# Altium PCB Circular PCB - Radial.PcbDoc (part 1 of 4)
Units mm, origin at the board's own origin, x right, y up, seen from the top; angles counter-clockwise.
Board outline 100 x 100 mm, 6 copper layers (Top Layer, GND (Top), X, Y, GND (Bot), Bottom Layer), stack 1.599 mm thick; 194 components, 127 nets, 612 pads, 161 vias.
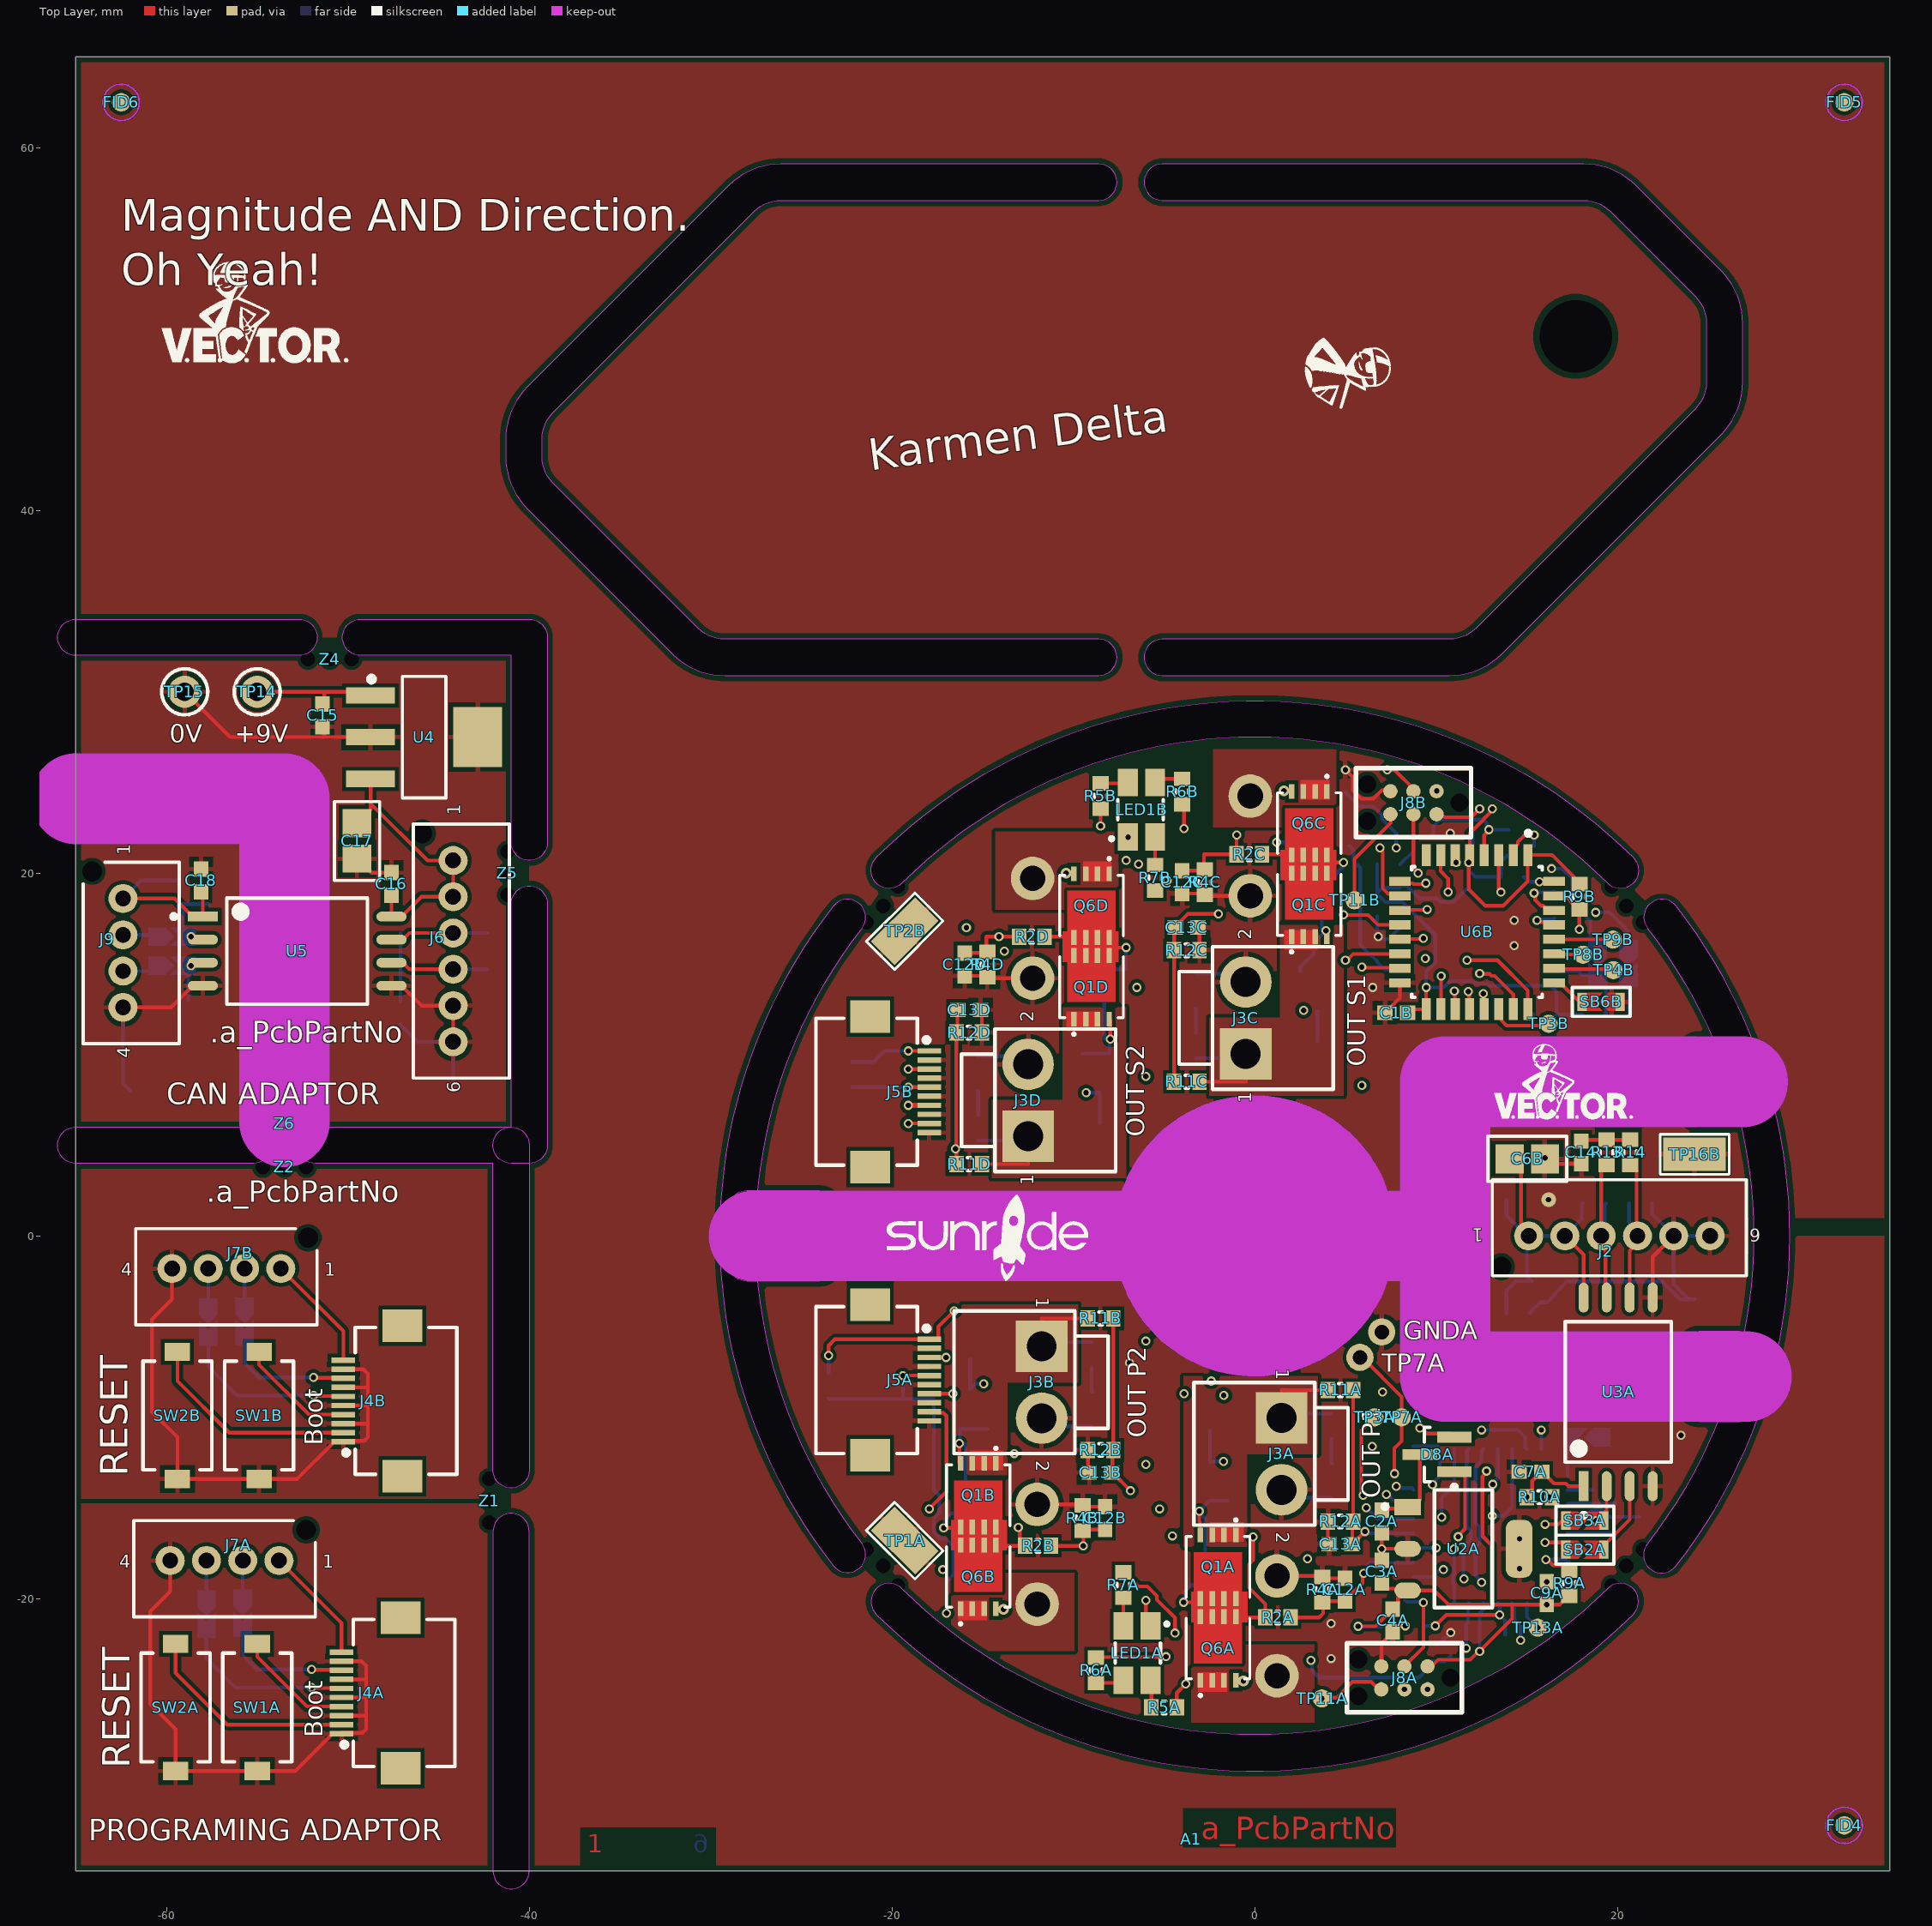
[diagram p0: Top Layer view]
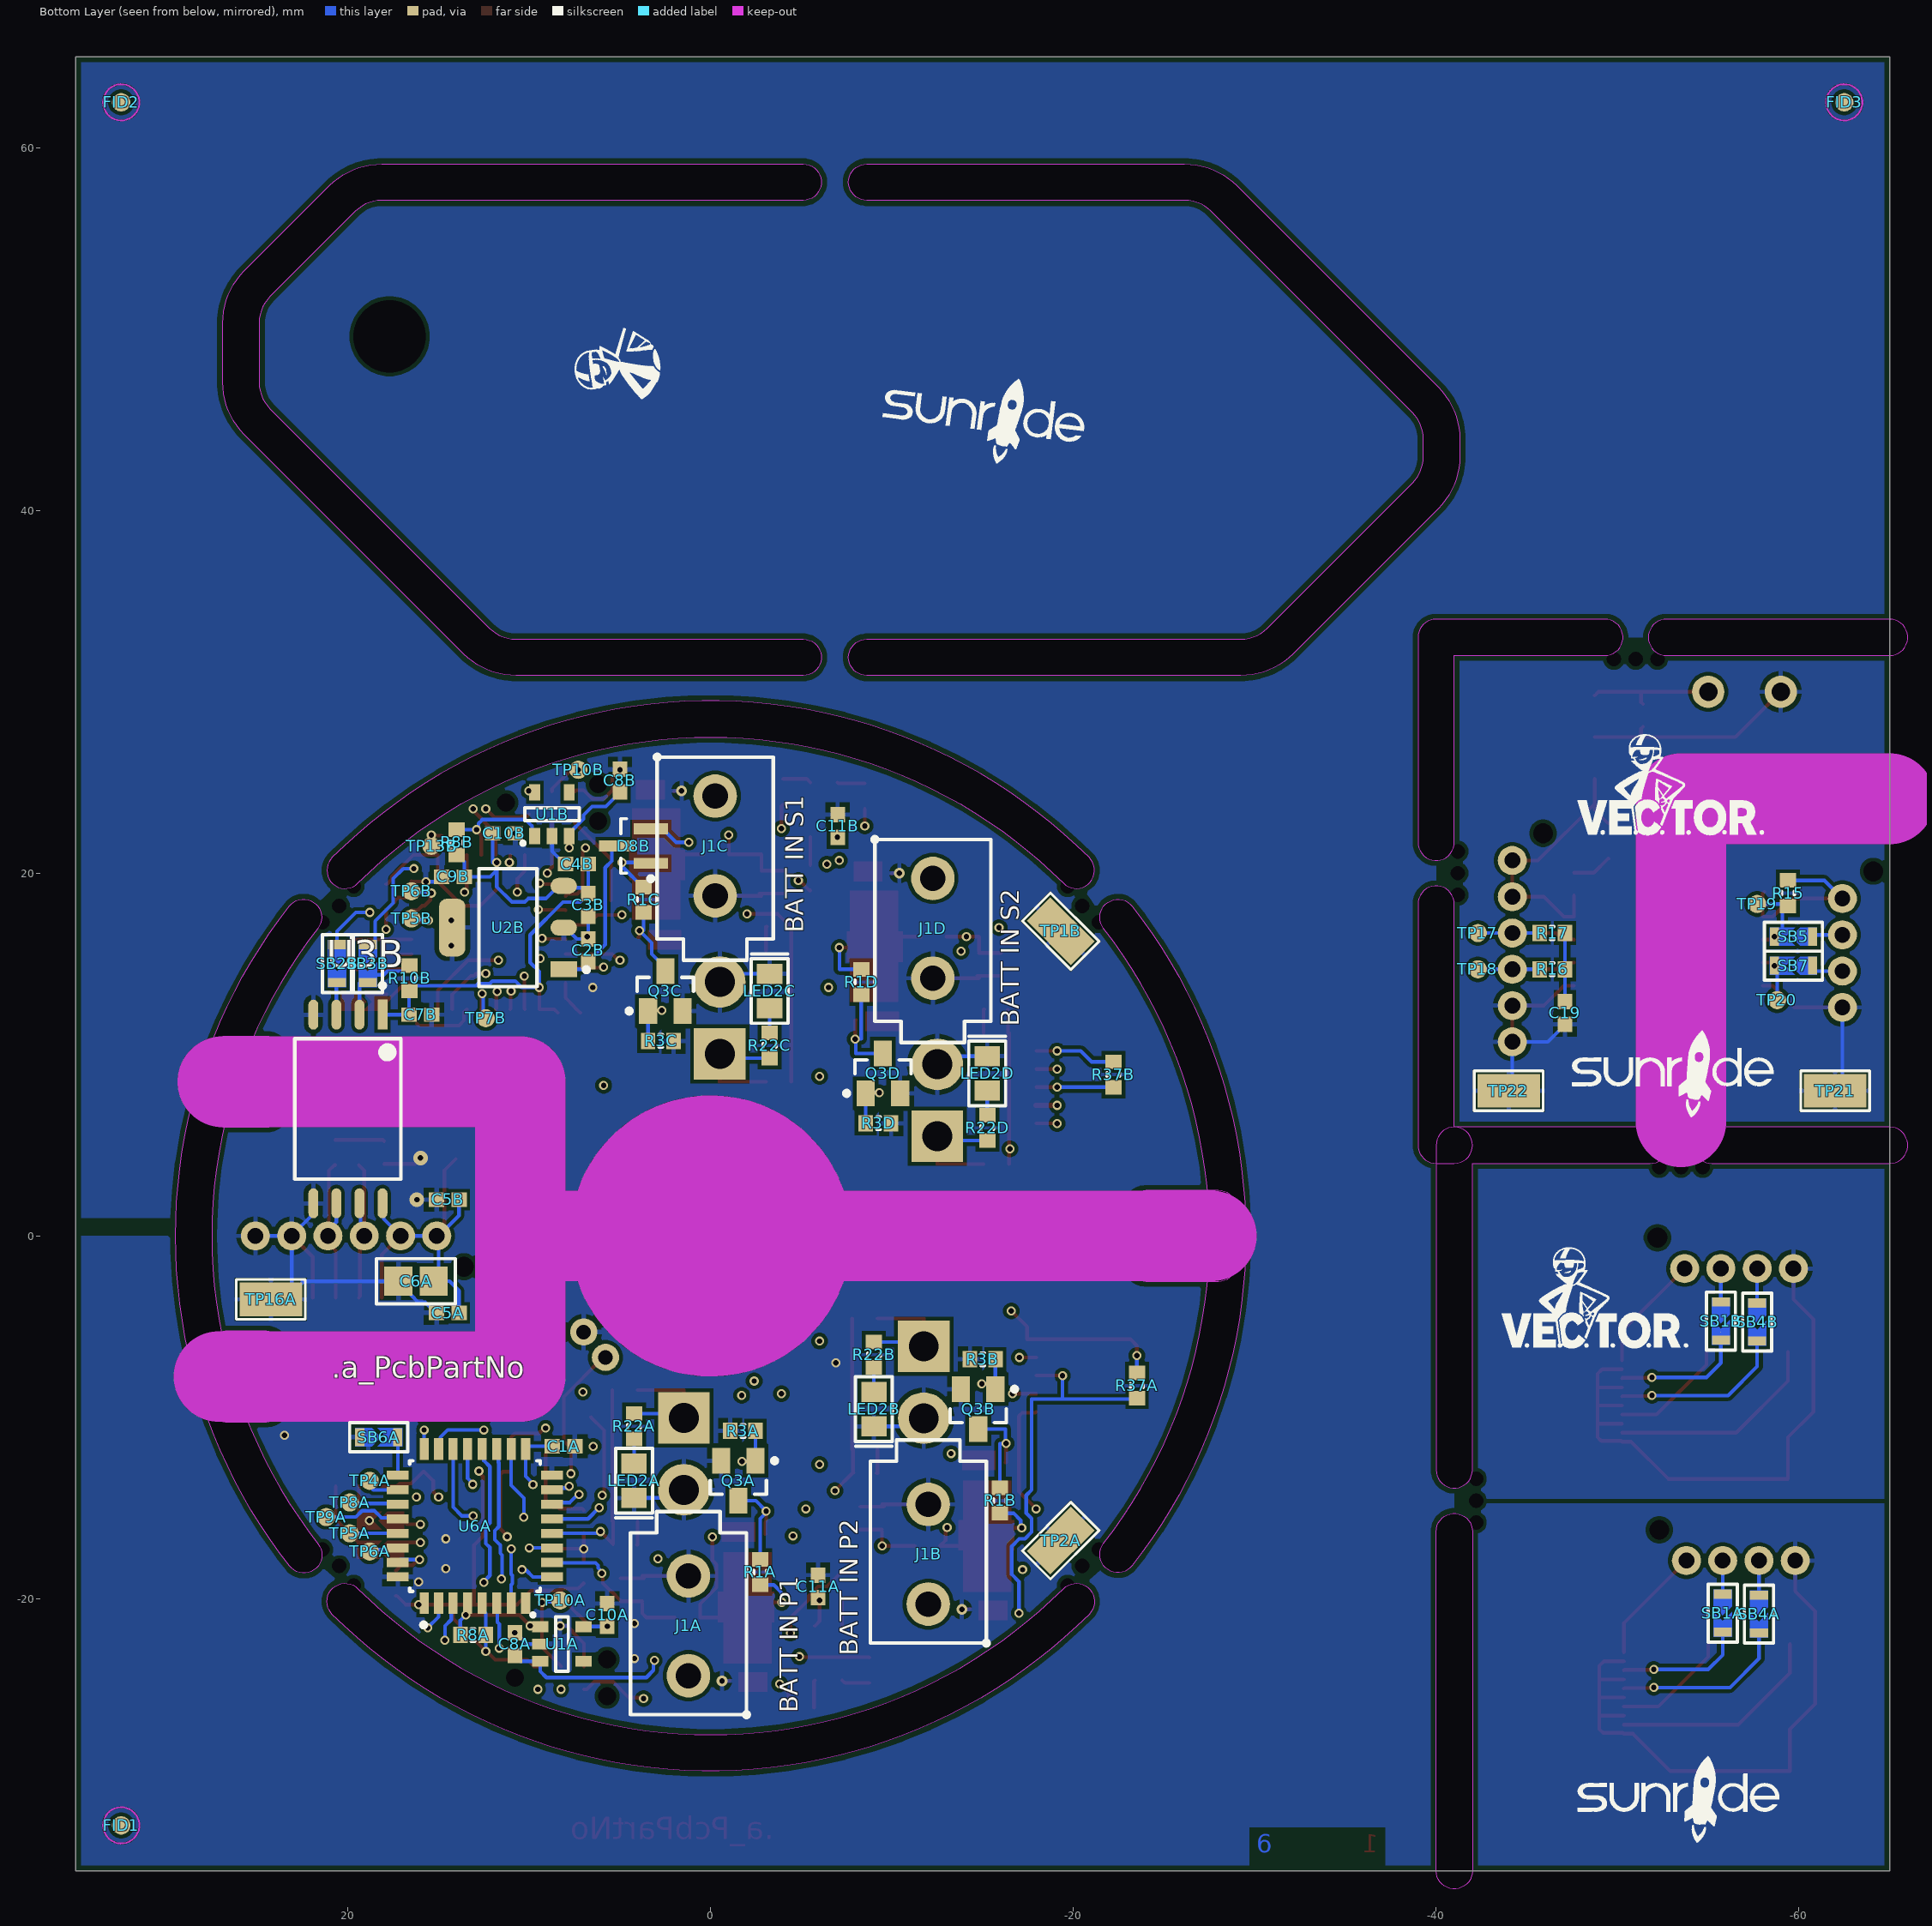
[diagram p1: Bottom Layer view, seen from below]
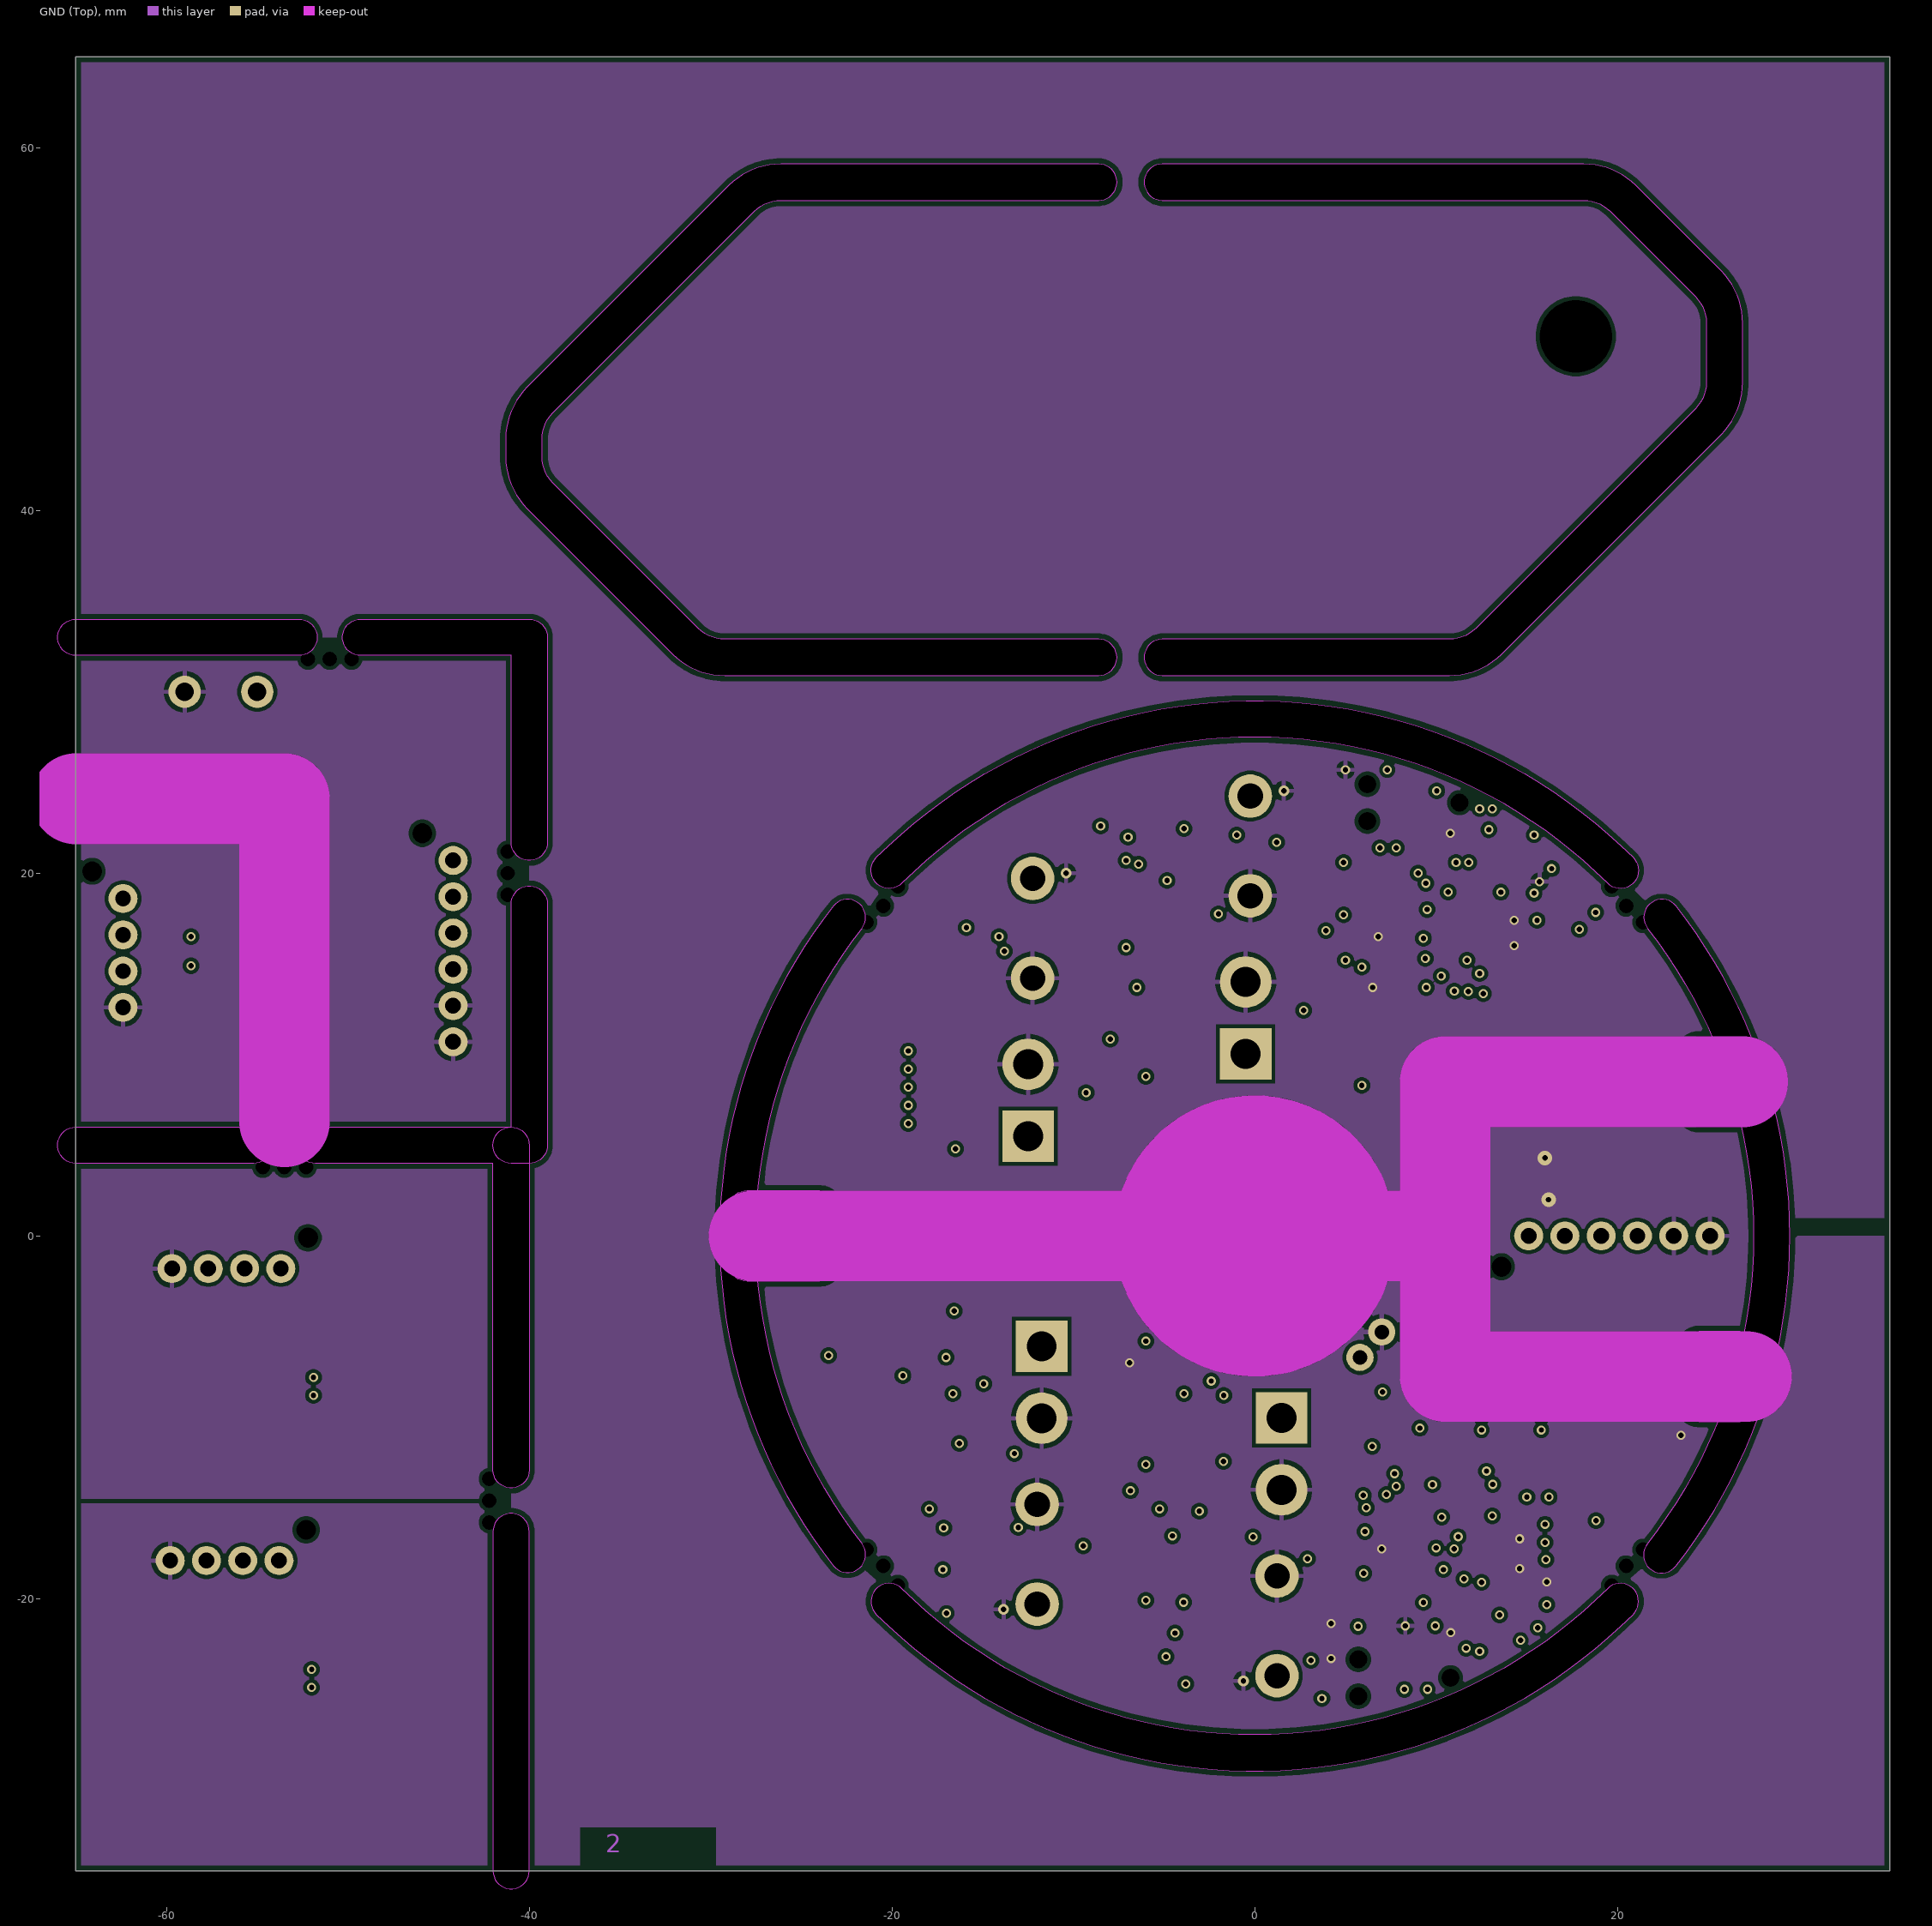
[diagram p2: GND (Top)]
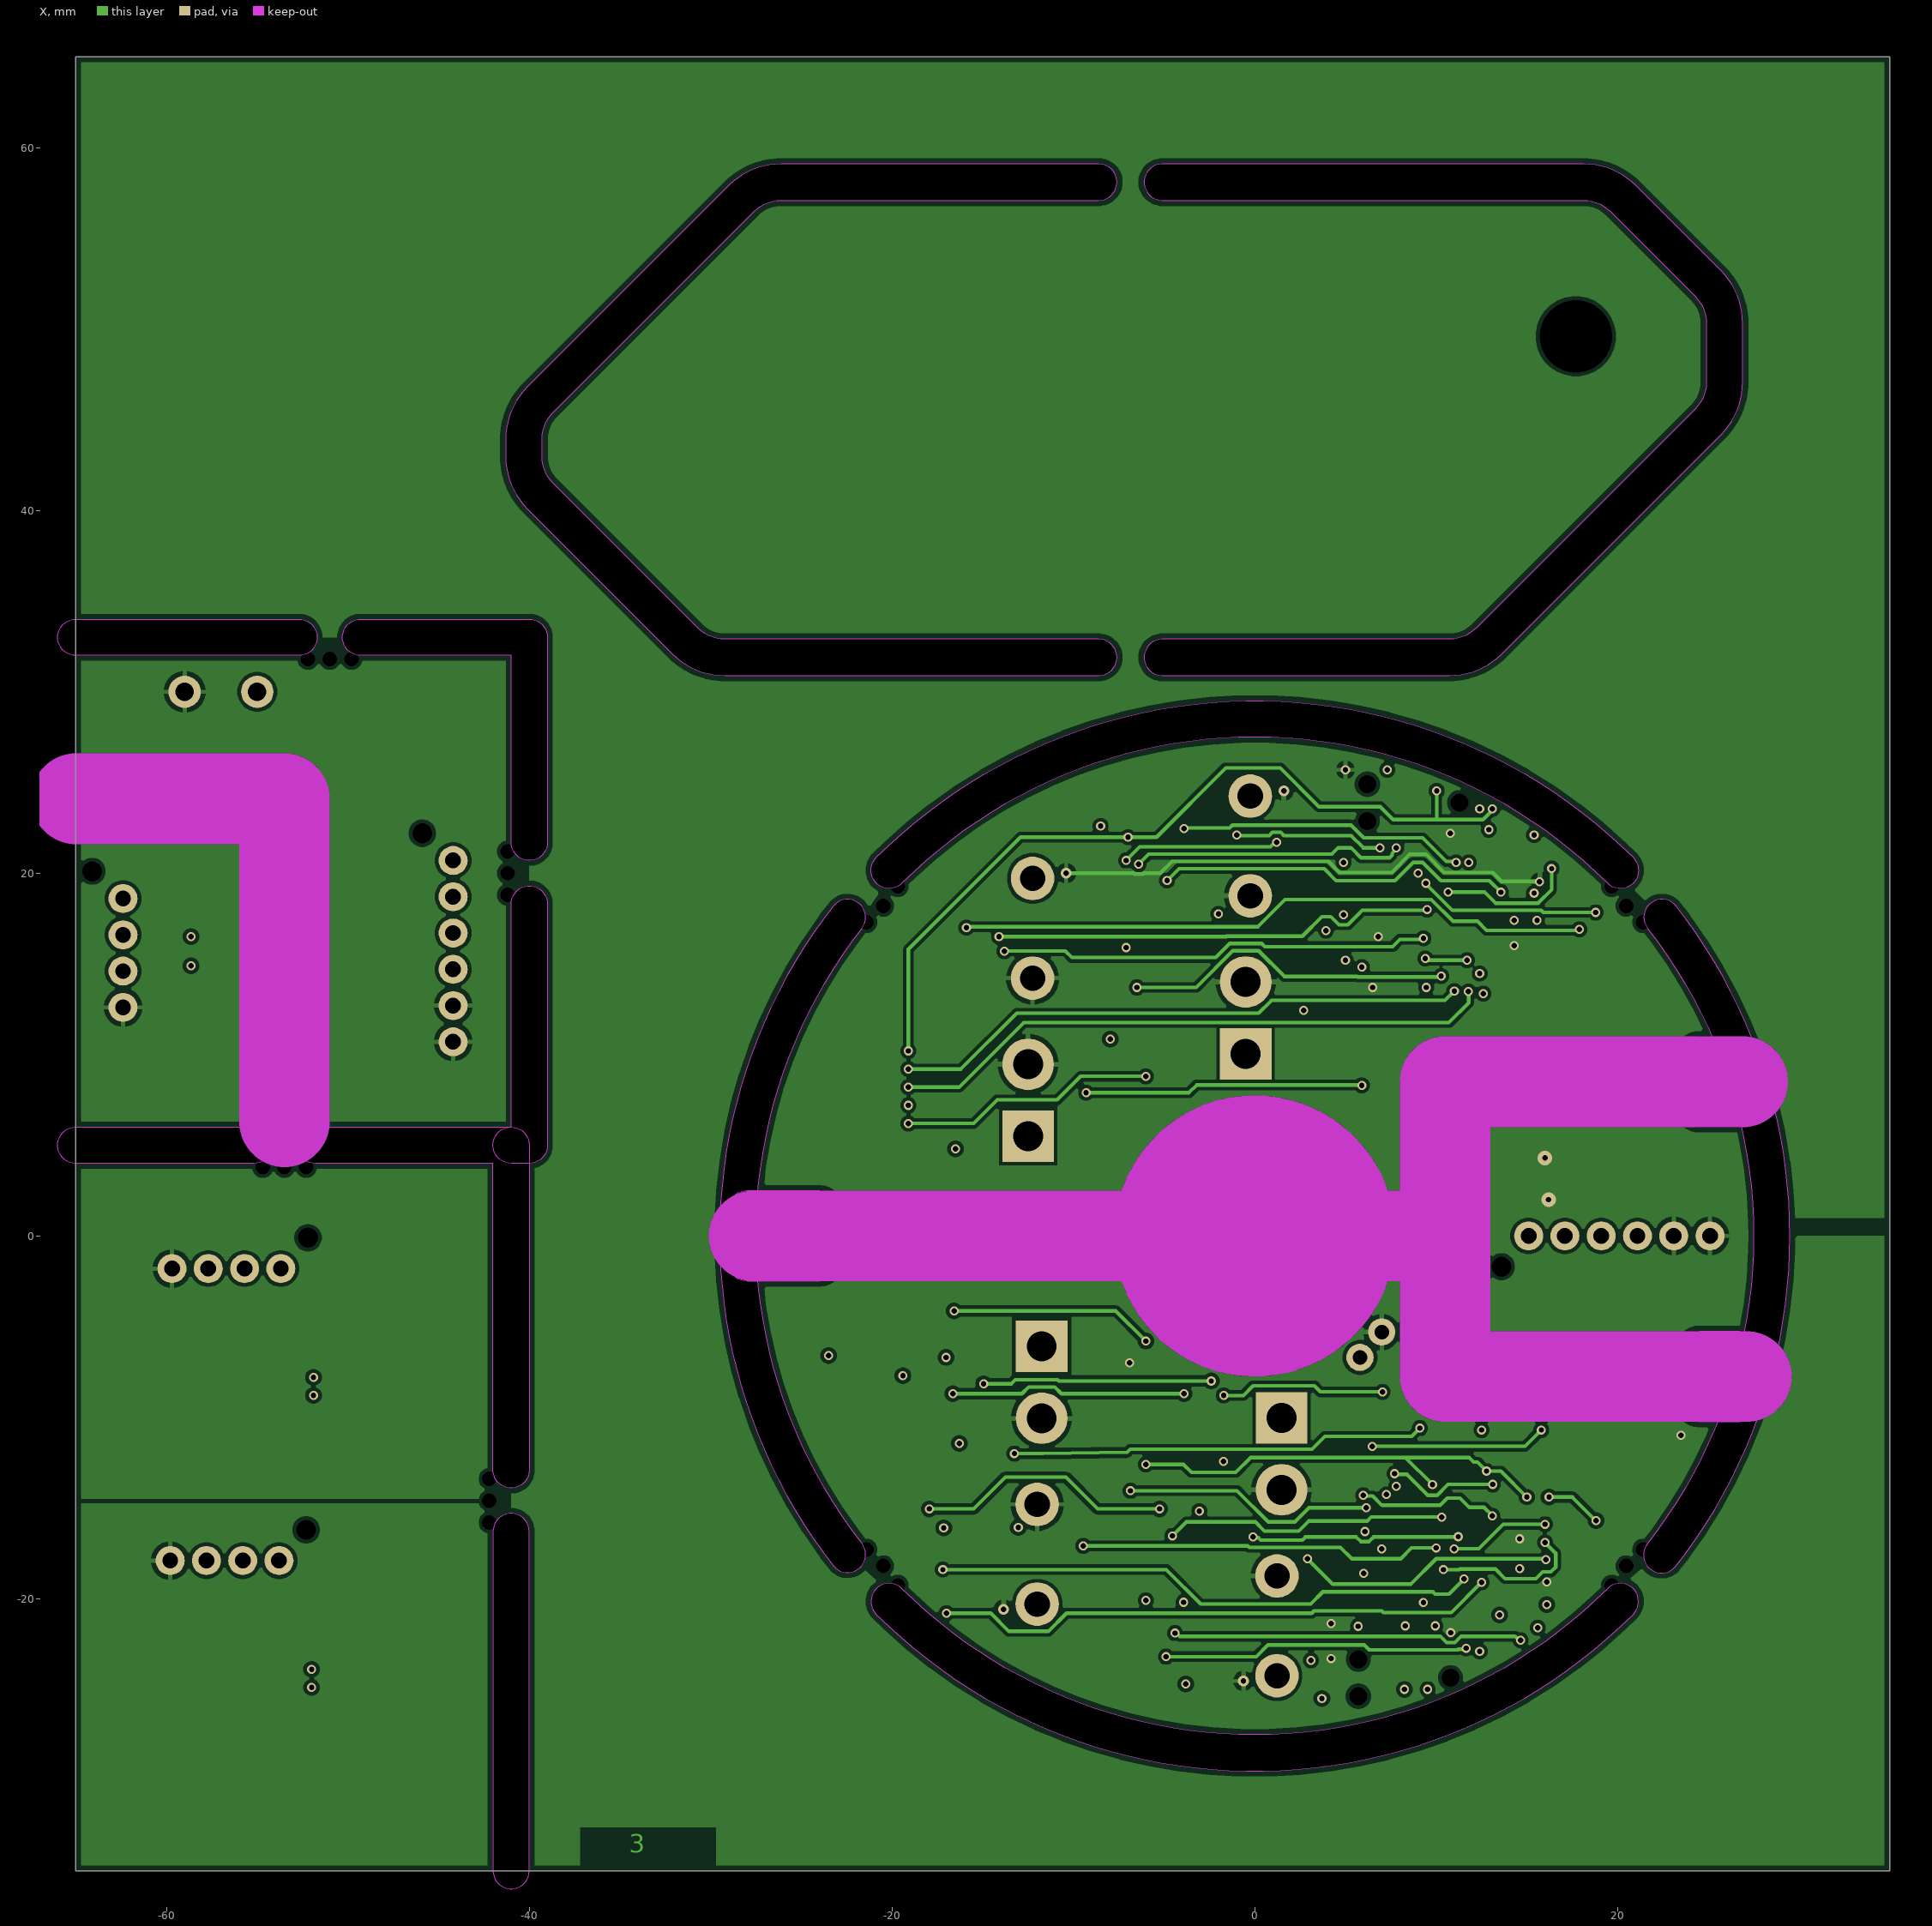
[diagram p3: X]
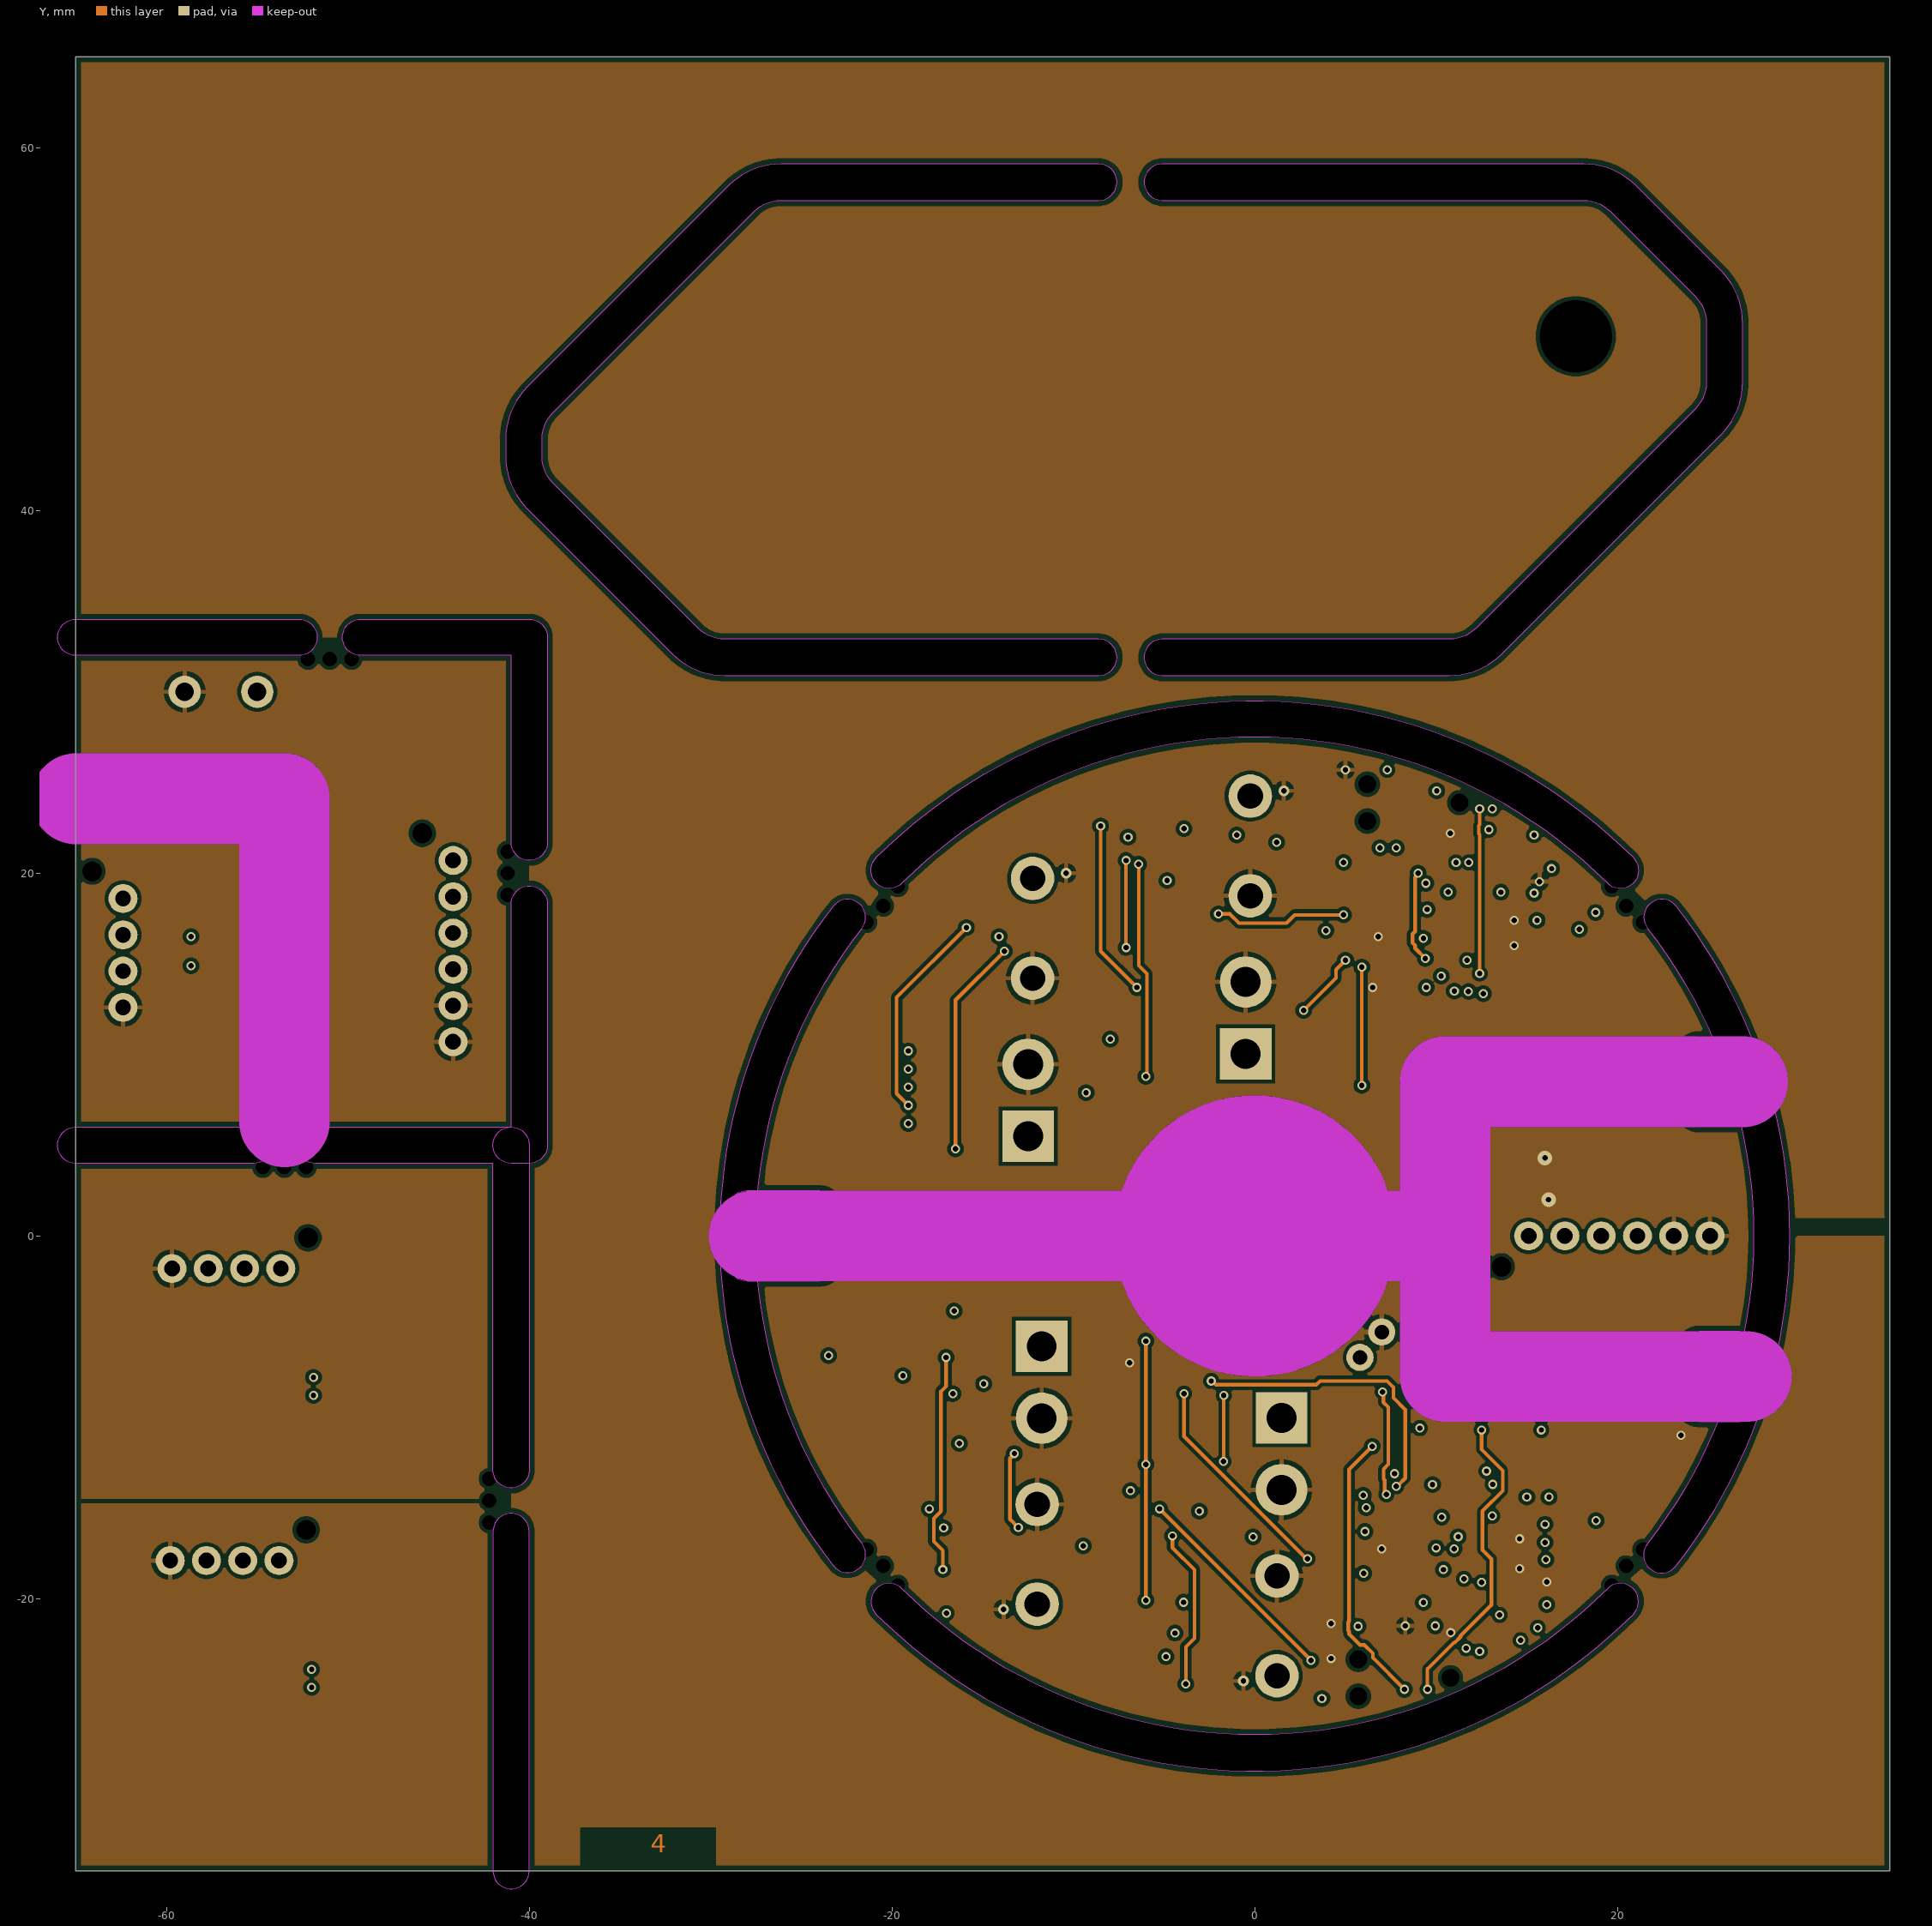
[diagram p4: Y]
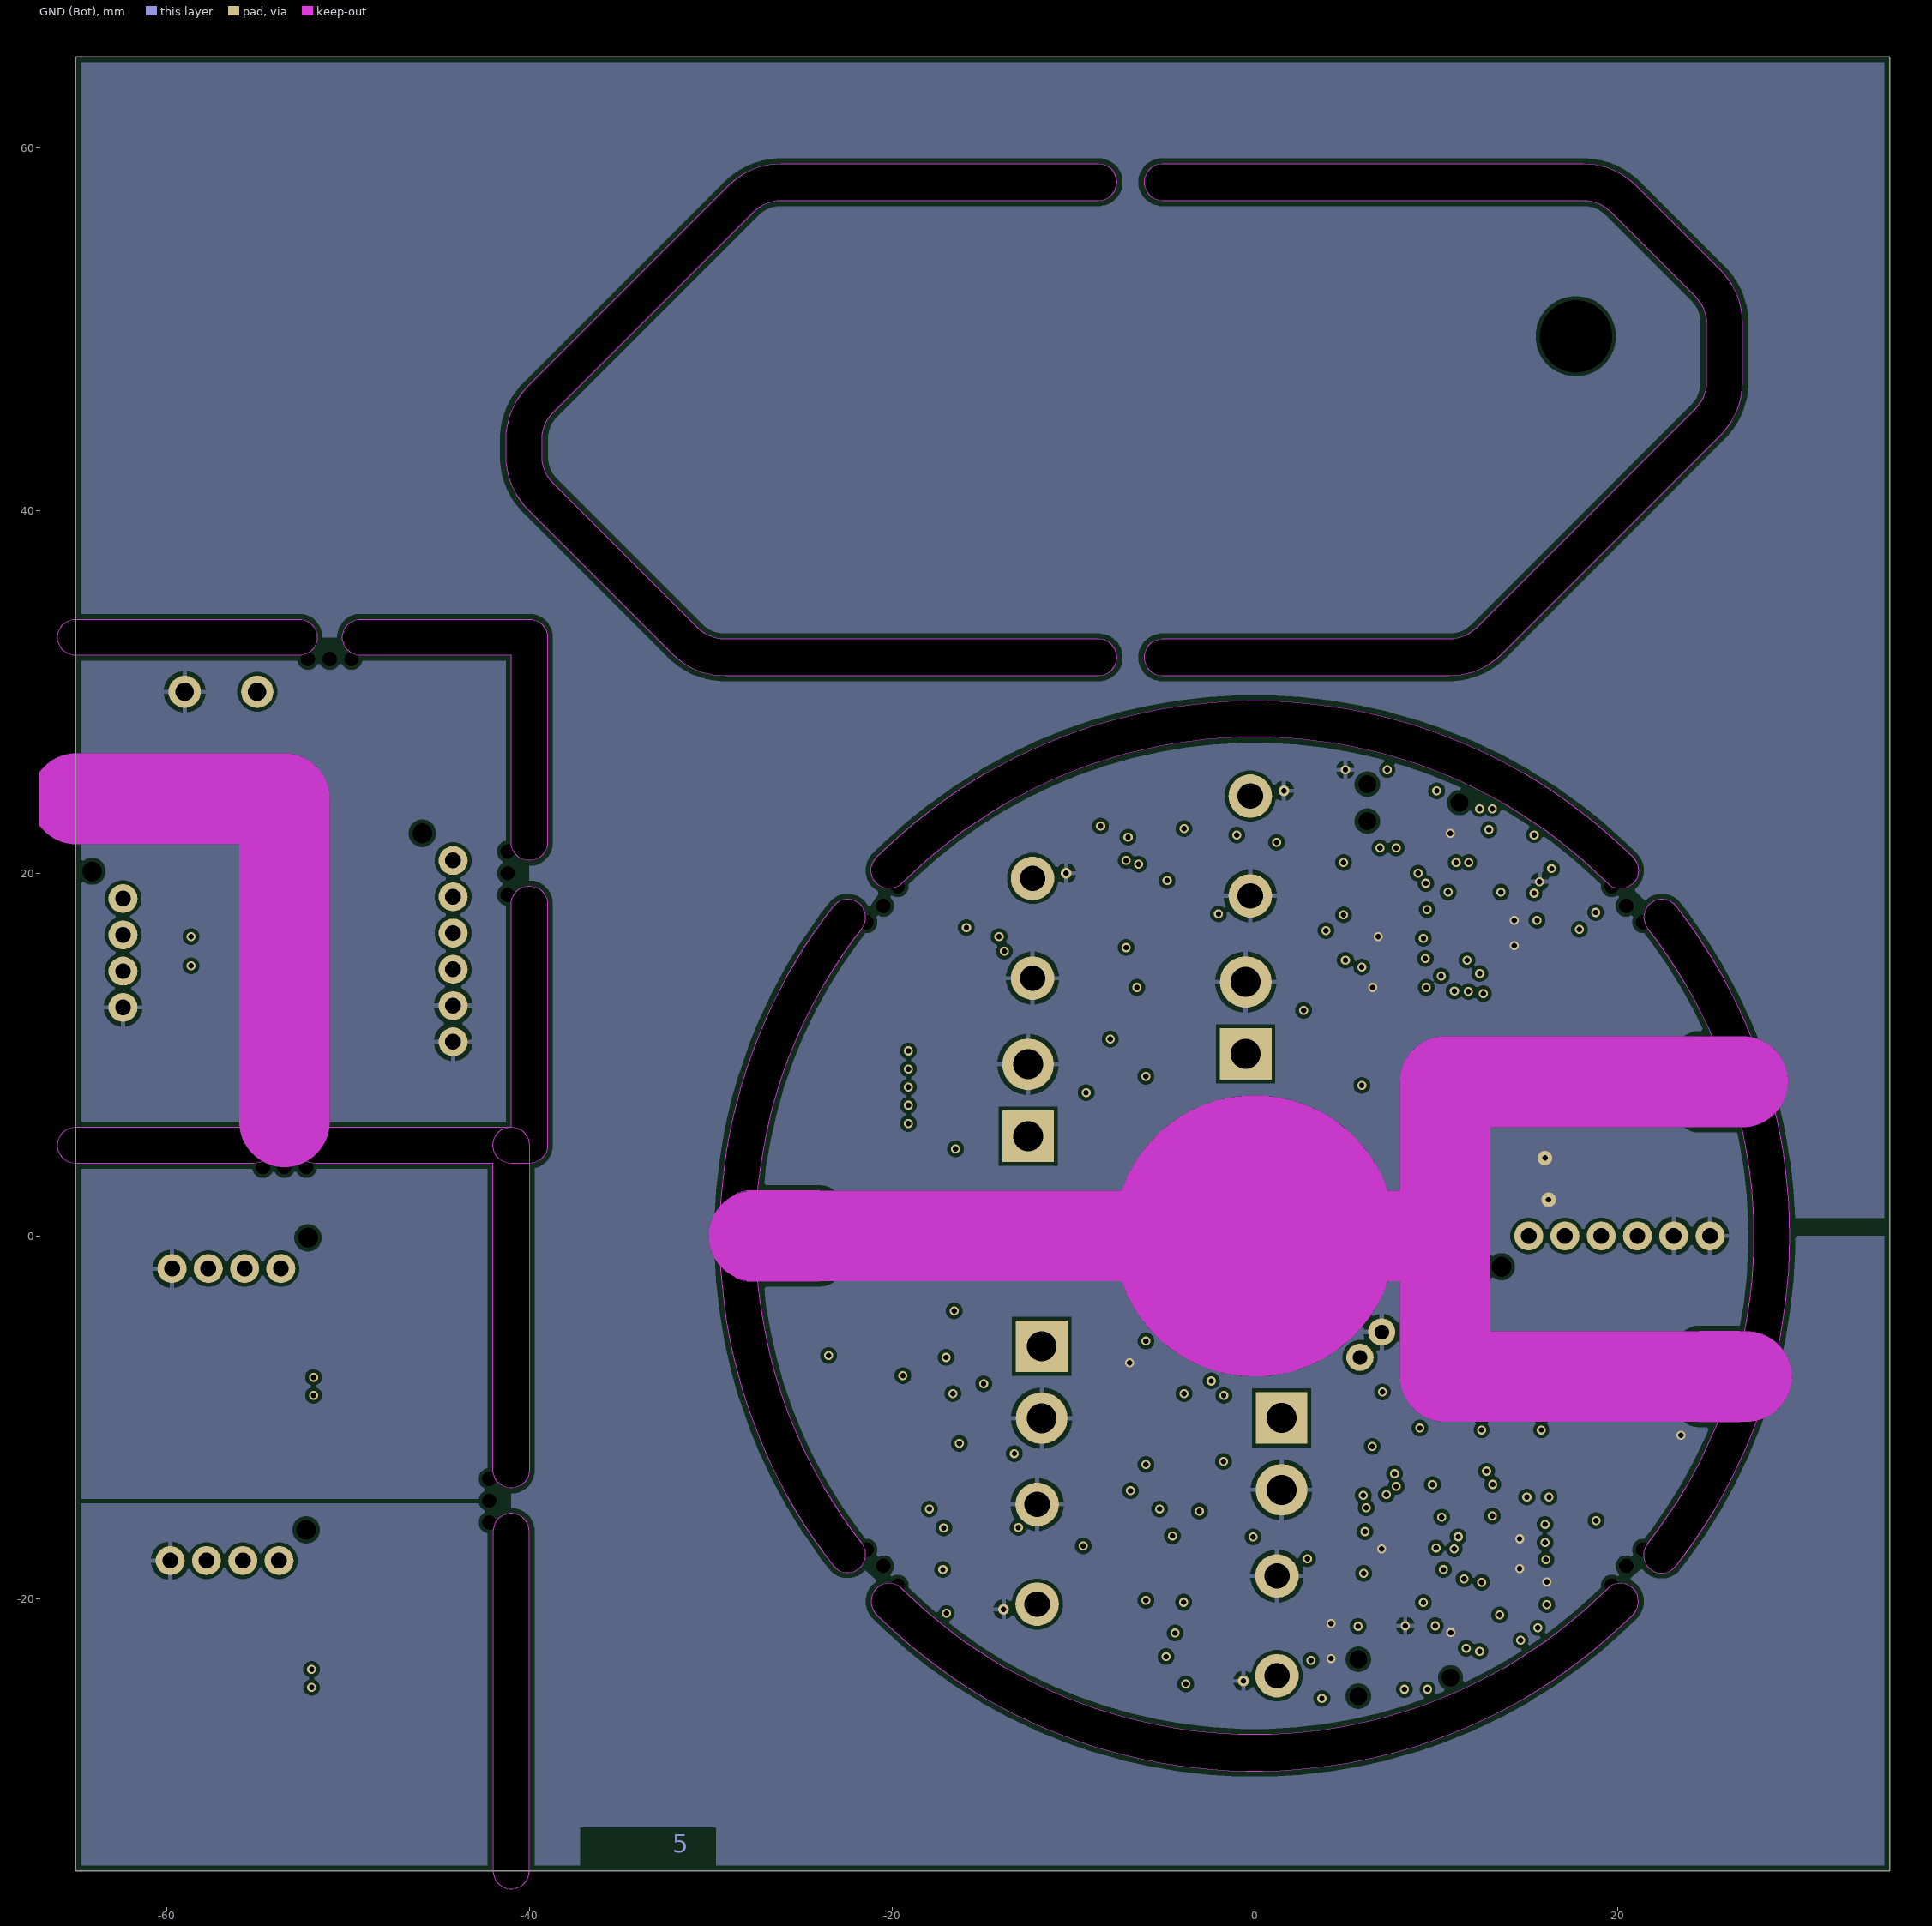
[diagram p5: GND (Bot)]
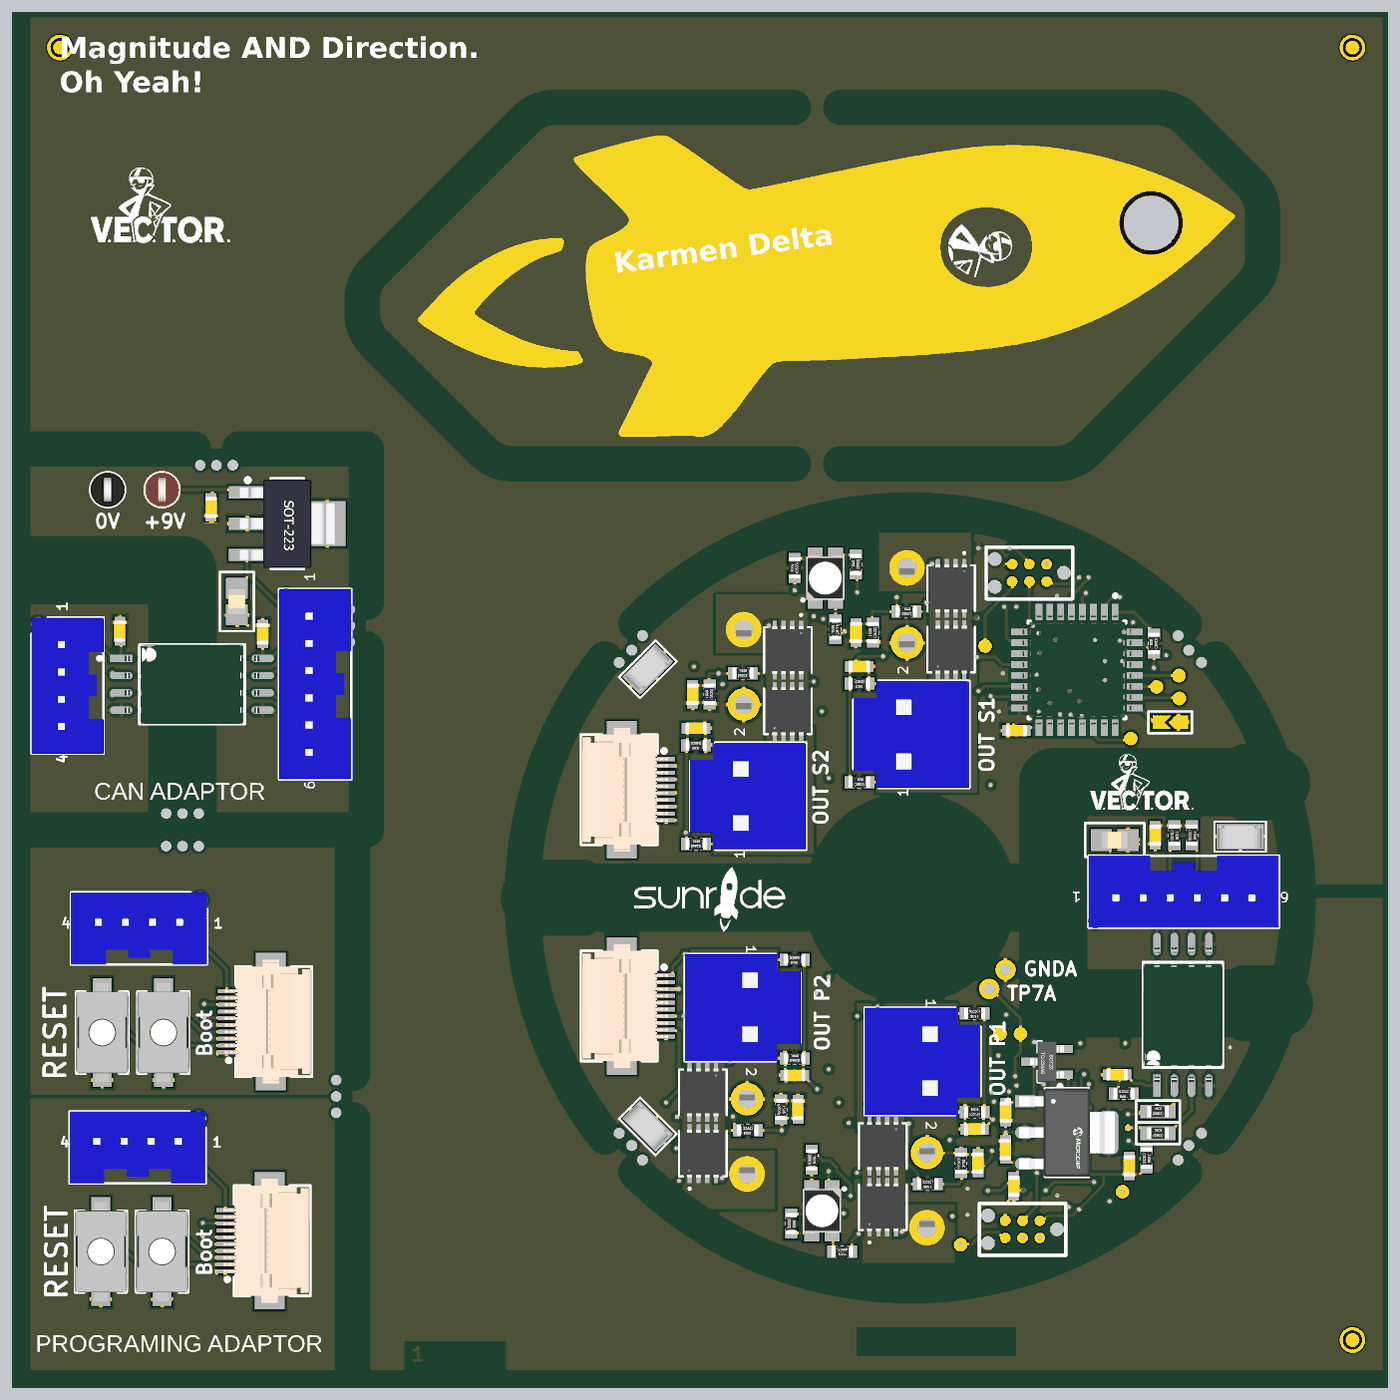
[diagram p8: 3D render of the assembled board from above, using the file's embedded part models]
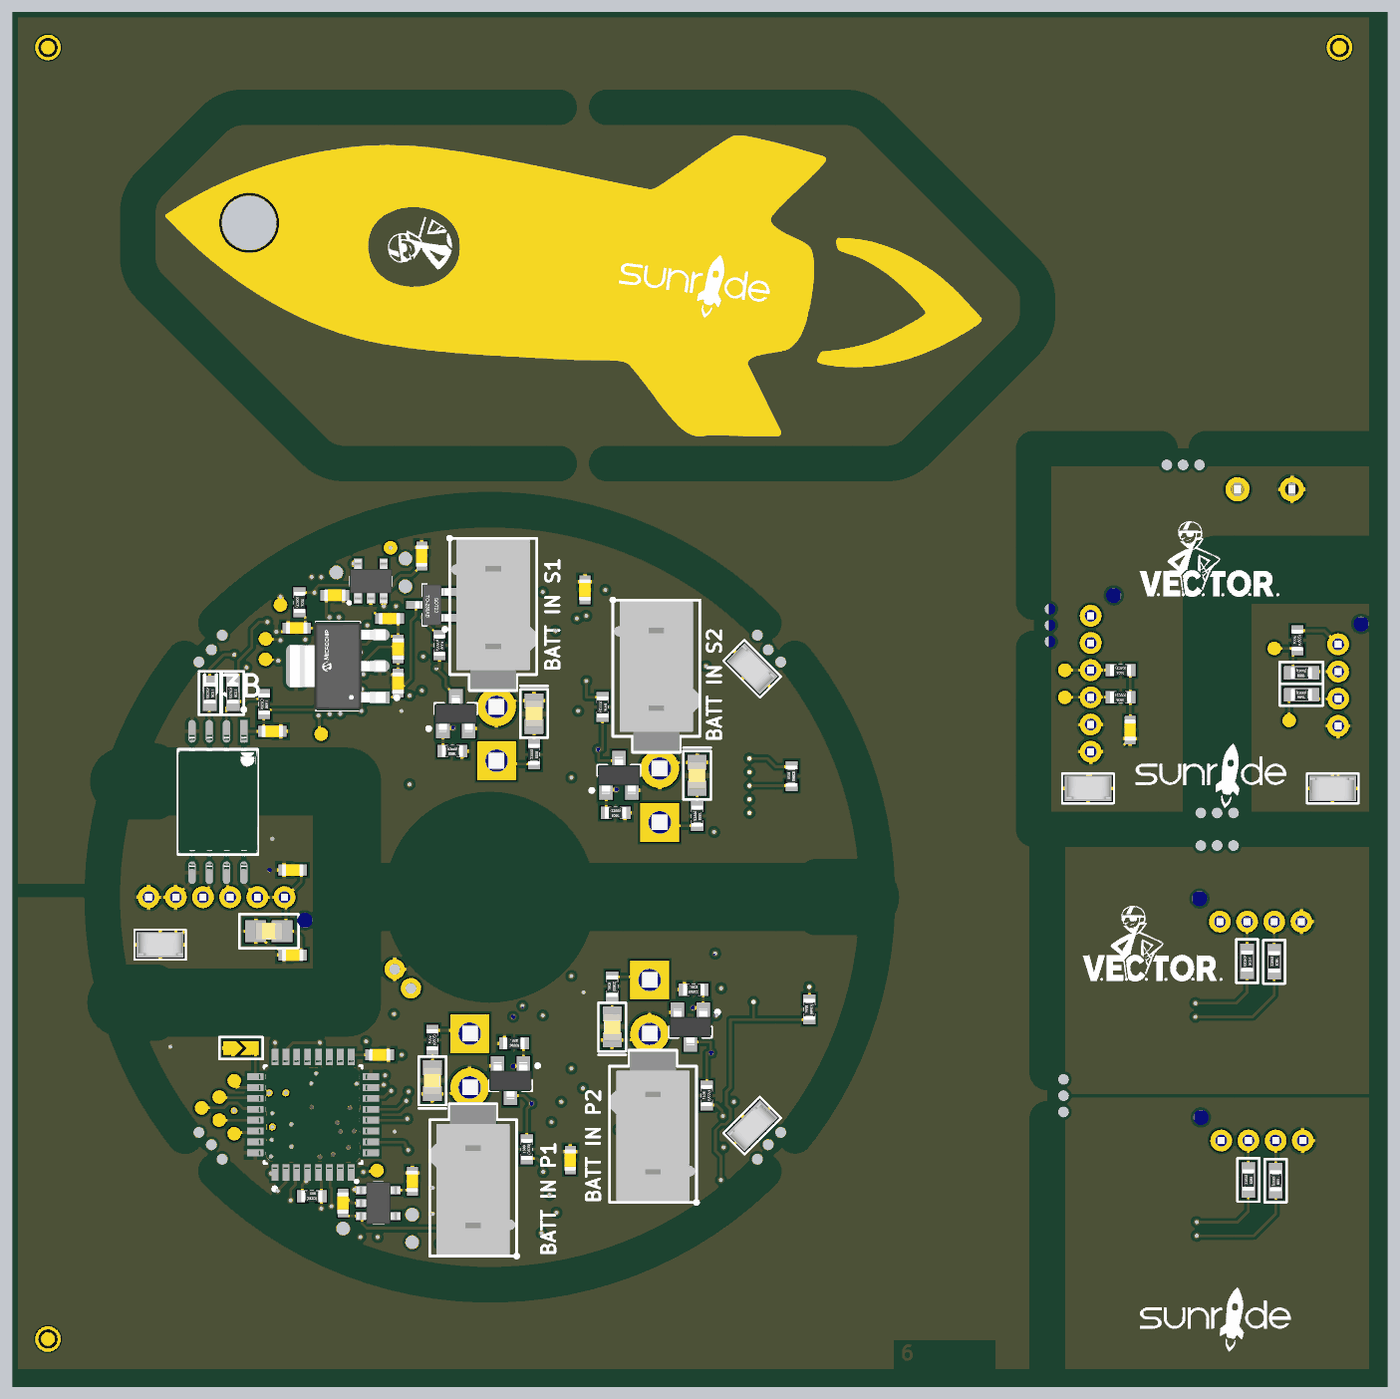
[diagram p9: 3D render of the assembled board from below, using the file's embedded part models]

## Layer stack, top to bottom
Top Solder: solder mask 0.0102, Solder Resist, Dk 3.5
Top Layer: signal copper 0.07
Dielectric 2: prepreg 0.0994, 3313*1, Dk 4.1
GND (Top): signal copper 0.0152
Dielectric 4: core 0.55, Core-009, Dk 4.5
X: signal copper 0.0152
Dielectric 1: prepreg 0.0994, 3313*1, Dk 4.8
Y: signal copper 0.0152
Dielectric 5: core 0.55, Core-009, Dk 4.5
GND (Bot): signal copper 0.0152
Dielectric 3: prepreg 0.0994, 3313*1, Dk 4.1
Bottom Layer: signal copper 0.07
Bottom Solder: solder mask 0.0102, Solder Resist, Dk 3.5

## Board outline
-65,-35 -65,65 35,65 35,-35
cut-out: -38.695,41.509 cw(c-37.234,42.97) -39.3,42.97 -39.3,43.93 cw(c-37.234,43.93) -38.695,45.391 -27.591,56.495 cw(c-26.13,55.034) -26.13,57.1 -8.6,57.1 ccw(c-8.6,58.1) -7.6,58.1 ccw(c-8.6,58.1) -8.6,59.1 -26.13,59.1 ccw(c-26.13,55.034) -29.005,57.909 -40.109,46.805 ccw(c-37.234,43.93) -41.3,43.93 -41.3,42.97 ccw(c-37.234,42.97) -40.109,40.095 -32.105,32.091 ccw(c-29.23,34.966) -29.23,30.9 -8.6,30.9 ccw(c-8.6,31.9) -7.6,31.9 ccw(c-8.6,31.9) -8.6,32.9 -29.23,32.9 cw(c-29.23,34.966) -30.689,33.504 -30.691,33.505
cut-out: -5.1,30.9 10.73,30.9 ccw(c10.73,34.966) 13.605,32.091 25.709,44.195 ccw(c22.834,47.07) 26.9,47.07 26.9,50.33 ccw(c22.834,50.33) 25.709,53.205 21.005,57.909 ccw(c18.13,55.034) 18.13,59.1 18.1,59.1 -5.1,59.1 ccw(c-5.1,58.1) -5.1,57.1 18.1,57.1 18.13,57.1 cw(c18.13,55.034) 19.591,56.495 24.295,51.791 cw(c22.834,50.33) 24.9,50.33 24.9,47.07 cw(c22.834,47.07) 24.295,45.609 12.191,33.505 cw(c10.73,34.966) 10.73,32.9 -5.1,32.9 ccw(c-5.1,31.9)
cut-out: -41,4 cw(c-41,5) -41,6 -41,18.3 cw(c-40,18.3) -39,18.3 -39,5 cw(c-40,5) -40,4
cut-out: -49.3,32 cw(c-49.3,33) -49.3,34 -40,34 cw(c-40,33) -39,33 -39,21.7 cw(c-40,21.7) -41,21.7 -41,32
cut-out: -65,32 cw(c-65,33) -65,34 -52.7,34 cw(c-52.7,33) -51.7,33 cw(c-52.7,33) -52.7,32
cut-out: 24.5,-8.75 cw(c24.5,-7.75) 24.5,-6.75 26.75,-6.75 cw(c26.75,-7.75) 27.75,-7.75 cw(c26.75,-7.75) 26.75,-8.75
cut-out: 24.5,7.5 cw(c24.5,8.5) 24.5,9.5 26.75,9.5 cw(c26.75,8.5) 27.75,8.5 cw(c26.75,8.5) 26.75,7.5
cut-out: -28,-1 cw(c-28,0) -28,1 -24,1 cw(c-24,0) -23,0 cw(c-24,0) -24,-1
cut-out: -23.242,-18.175 ccw(c-22.454,-17.559) -21.454,-17.559 ccw(c-22.454,-17.559) -21.666,-16.942 cw(c0,0) -21.666,16.942 ccw(c-22.454,17.559) -21.454,17.559 ccw(c-22.454,17.559) -23.242,18.175 ccw(c0,0)
cut-out: 21.645,-16.969 ccw(c22.433,-17.586) 23.22,-18.204 ccw(c0,0) 29.505,0 ccw(c0,0) 23.24,18.178 ccw(c22.452,17.562) 21.664,16.946 cw(c0,0) 27.504,0 cw(c0,0)
cut-out: -42,-35 ccw(c-41,-35) -40,-35 -40,-16.3 ccw(c-41,-16.3) -42,-16.3
cut-out: -51.8,4 cw(c-51.8,5) -51.8,6 -41,6 cw(c-41,5) -40,5 -40,-12.9 cw(c-41,-12.9) -42,-12.9 -42,4
cut-out: -65,4 cw(c-65,5) -65,6 -55.2,6 cw(c-55.2,5) -54.2,5 cw(c-55.2,5) -55.2,4
cut-out: -20.863,-20.863 ccw(c0,0) 20.863,-20.863 ccw(c20.156,-20.156) 21.156,-20.156 ccw(c20.156,-20.156) 19.448,-19.448 cw(c0,0) -19.448,-19.448 ccw(c-20.156,-20.156)
cut-out: -19.448,19.448 cw(c-20.156,20.156) -20.863,20.863 cw(c0,0) 20.863,20.863 cw(c20.156,20.156) 21.156,20.156 cw(c20.156,20.156) 19.448,19.448 ccw(c0,0)
cut-out: 23.5,7 23.5,10 cw(c24.5,10) 24.5,11 26.75,11 cw(c26.75,10) 27.75,10 cw(c26.75,10) 26.75,9 25.5,9 25.5,8 26.75,8 cw(c26.75,7) 27.75,7 cw(c26.75,7) 26.75,6 24.5,6 cw(c24.5,7)
cut-out: 23.5,-9.25 23.5,-6.25 cw(c24.5,-6.25) 24.5,-5.25 26.75,-5.25 cw(c26.75,-6.25) 27.75,-6.25 cw(c26.75,-6.25) 26.75,-7.25 25.5,-7.25 25.5,-8.25 26.75,-8.25 cw(c26.75,-9.25) 27.75,-9.25 cw(c26.75,-9.25) 26.75,-10.25 24.5,-10.25 cw(c24.5,-9.25)
cut-out: -28,-2.5 cw(c-28,-1.5) -28,-0.5 -25,-0.5 -25,0.5 -28,0.5 cw(c-28,1.5) -28,2.5 -24,2.5 cw(c-24,1.5) -23,1.5 -23,-1.5 cw(c-24,-1.5) -24,-2.5
cut-out: 0,-4.1 cw(c0,0) -4.1,0 cw(c0,0) 0,4.1 cw(c0,0) 4.1,0 cw(c0,0)

## Design rules (kind name [scope] priority, off if disabled: settings)
BoardOutlineClearance [All] p1: gap=0.3 ignorepadtopadclearanceinfootprint=FALSE
Clearance "Clearance keep out" [IsKeepOut] p1: gap=0 ignorepadtopadclearanceinfootprint=FALSE
Clearance [All] p2: gap=0.2 ignorepadtopadclearanceinfootprint=FALSE
MinimumSolderMaskSliver [All] p1: minsoldermaskwidth=0.2
PolygonConnect PolygonConnect_POWER [InNet('NetJ1D_1') or InNet('NetJ1C_1') or InNet('NetJ1B_1') or InNet('NetJ1A_1') or InNet('NetJ3D_1') or InNet('NetJ3C_1') or InNet('NetJ3B_1') or InNet('NetJ3A_1')] p1: connectstyle=Direct reliefconductorwidth=0.254 reliefentries=4 polygonreliefangle="90 Angle" airgapwidth=0.254
PolygonConnect PolygonConnect_1 [All] p2: connectstyle=Relief reliefconductorwidth=0.254 reliefentries=4 polygonreliefangle="90 Angle" airgapwidth=0.254
RoomDefinition U_AncillariesB [InComponentClass('U_AncillariesB')] p1: confinementstyle=ConfineIn formatcopy=FALSE lockcomponents=FALSE outline -63,-14.7 -43.4,-14.7 -43.4,1.2 -63,1.2
RoomDefinition U_AncillariesA [InComponentClass('U_AncillariesA')] p2: confinementstyle=ConfineIn formatcopy=TRUE lockcomponents=FALSE outline -63.1,-30.8 -43.5,-30.8 -43.5,-14.9 -63.1,-14.9
RoomDefinition "U_Output Stages_P2" [InComponentClass('U_Output Stages_P2')] p3: confinementstyle=ConfineIn formatcopy=TRUE lockcomponents=FALSE outline -6.5,-24.05 -6.5,-3.55 -18.25,-3.55 -18.25,-24.05
RoomDefinition "U_Output Stages_P1" [InComponentClass('U_Output Stages_P1')] p4: confinementstyle=ConfineIn formatcopy=TRUE lockcomponents=FALSE outline 6.725,-27.997 6.725,-7.497 -5.025,-7.497 -5.025,-27.997
RoomDefinition "U_Output Stages_S1" [InComponentClass('U_Output Stages_S1')] p5: confinementstyle=ConfineIn formatcopy=TRUE lockcomponents=FALSE outline -5.75,28 -5.75,7.5 6,7.5 6,28
RoomDefinition "U_Output Stages_S2" [InComponentClass('U_Output Stages_S2')] p6: confinementstyle=ConfineIn formatcopy=FALSE lockcomponents=FALSE outline -17.75,23.46 -17.75,2.96 -6,2.96 -6,23.46
RoomDefinition Microcontroller_S [InComponentClass('Microcontroller_S')] p7: confinementstyle=ConfineIn formatcopy=TRUE lockcomponents=FALSE outline -24.8,1.1 26.5,1.1 26.5,26.6 -24.8,26.6
RoomDefinition Microcontroller_P [InComponentClass('Microcontroller_P')] p8: confinementstyle=ConfineIn formatcopy=TRUE lockcomponents=FALSE outline -24.8,-26.9 26.5,-26.9 26.5,-0.8 -24.8,-0.8
RoomDefinition "Top Sheet" [InComponentClass('Top Sheet')] p9: confinementstyle=ConfineIn formatcopy=TRUE lockcomponents=FALSE outline -63.9,-33.9 33.9,-33.9 33.9,63.9 -63.9,63.9
RoutingVias [All] p1: holewidth=0.3 width=0.5 viastyle="Through Hole" minholewidth=0.3 minwidth=0.5 maxholewidth=1 maxwidth=2
SolderMaskExpansion [All] p1: expansion=0.102 istentingtop=FALSE
Width [All] p1: maxlimit=5 minlimit=0.2 preferedwidth=0.3
29 further rules are at their usual default settings.

## Classes and differential pairs
net class "PC Comms Domain": 3V3 GND NetJ9_2 NetJ9_3 NetR15_1 NetSB7_2
component class "U_CAN Adaptor": C15 C16 C17 C18 C19 J6 J9 R15 R16 R17 SB5 SB7 TP14 TP15 TP17 TP18 TP19 TP20 TP21 TP22 U4 U5
net class "Top Sheet_Nets": NetC14_1
net class U_AncillariesB_Nets: NetJ4B_1 NetJ4B_2 NetJ4B_4 NetJ4B_6 NetJ4B_8 NetJ4B_10 NetJ7B_2 NetJ7B_3
net class U_AncillariesA_Nets: NetJ4A_1 NetJ4A_2 NetJ4A_4 NetJ4A_6 NetJ4A_8 NetJ4A_10 NetJ7A_2 NetJ7A_3
channel class Ancillaries: U_AncillariesA U_AncillariesB
component class U_AncillariesB: J4B J7B SB1B SB4B SW1B SW2B
component class U_AncillariesA: J4A J7A SB1A SB4A SW1A SW2A
net class "U_Output Stages_S2_Nets": NetJ1D_1 NetJ3D_1 NetLED2D_2 NetQ1D_4
net class "U_Output Stages_S1_Nets": NetJ1C_1 NetJ3C_1 NetLED2C_2 NetQ1C_4
net class "U_Output Stages_P2_Nets": NetJ1B_1 NetJ3B_1 NetLED2B_2 NetQ1B_4
net class "U_Output Stages_P1_Nets": NetJ1A_1 NetJ3A_1 NetLED2A_2 NetQ1A_4
net class Microcontroller_S_Nets: 3V3B BOOT0B LED_BLUEB LED_GREENB LED_REDB LPUART1_RXB LPUART1_TXB NetC2B_1 NetJ8B_3 NetJ8B_6 NetLED1B_2 NetLED1B_3 NetLED1B_4 NetR10B_1 NetSB2B_2 NetSB6B_2 NetTP3B_1 NetTP4B_1 NetTP5B_1 NetTP6B_1 NetTP7B_1 NetTP8B_1 NetTP9B_1 NetTP13B_1 NetU1B_4 NRSTB RST_SWB SWCLKB SWDIOB USART2_RXB USART2_TXB
net class Microcontroller_P_Nets: 3V3A BOOT0A LED_BLUEA LED_GREENA LED_REDA LPUART1_RXA LPUART1_TXA NetC2A_1 NetJ8A_3 NetJ8A_6 NetLED1A_2 NetLED1A_3 NetLED1A_4 NetR10A_1 NetSB2A_2 NetSB6A_2 NetTP3A_1 NetTP4A_1 NetTP5A_1 NetTP6A_1 NetTP7A_1 NetTP8A_1 NetTP9A_1 NetTP13A_1 NetU1A_4 NRSTA RST_SWA SWCLKA SWDIOA USART2_RXA USART2_TXA
net class Reused: 3V3A 3V3B BOOT0A BOOT0B GNDA GNDB LED_BLUEA LED_BLUEB LED_GREENA LED_GREENB LED_REDA LED_REDB LPUART1_RXA LPUART1_RXB LPUART1_TXA LPUART1_TXB NetC2A_1 NetC2B_1 NetJ1A_1 NetJ1A_2 NetJ1B_1 NetJ1B_2 NetJ1C_1 NetJ1C_2 NetJ1D_1 NetJ1D_2 NetJ3A_1 NetJ3B_1 NetJ3C_1 NetJ3D_1 NetJ4A_1 NetJ4A_2 NetJ4A_4 NetJ4A_6 NetJ4A_8 NetJ4A_10 NetJ4B_1 NetJ4B_2 NetJ4B_4 NetJ4B_6 NetJ4B_8 NetJ4B_10 NetJ7A_2 NetJ7A_3 NetJ7B_2 NetJ7B_3 NetJ8A_3 NetJ8A_6 NetJ8B_3 NetJ8B_6 NetLED1A_2 NetLED1A_3 NetLED1A_4 NetLED1B_2 NetLED1B_3 NetLED1B_4 NetLED2A_2 NetLED2B_2 NetLED2C_2 NetLED2D_2 NetQ1A_4 NetQ1B_4 NetQ1C_4 NetQ1D_4 NetR10A_1 NetR10B_1 NetSB2A_2 NetSB2B_2 NetSB6A_2 NetSB6B_2 NetTP3A_1 NetTP3B_1 NetTP4A_1 NetTP4B_1 NetTP5A_1 NetTP5B_1 NetTP6A_1 NetTP6B_1 NetTP7A_1 NetTP7B_1 NetTP8A_1 NetTP8B_1 NetTP9A_1 NetTP9B_1 NetTP13A_1 NetTP13B_1 NetU1A_4 NetU1B_4 NRSTA NRSTB PRIMARY_OUT_EN_1 PRIMARY_OUT_EN_2 PRIMARY_OUT_SENSE_1 PRIMARY_OUT_SENSE_2 PRIMARY_VBATT_1 PRIMARY_VBATT_2 PRIMARY_VBATT_SENSE_1 PRIMARY_VBATT_SENSE_2 RST_SWA RST_SWB SECONDARY_OUT_EN_1 SECONDARY_OUT_EN_2 SECONDARY_OUT_SENSE_1 SECONDARY_OUT_SENSE_2 SECONDARY_VBATT_1 SECONDARY_VBATT_2 SECONDARY_VBATT_SENSE_1 SECONDARY_VBATT_SENSE_2 SWCLKA SWCLKB SWDIOA SWDIOB USART2_RXA USART2_RXB USART2_TXA USART2_TXB
component class "U_Output Stages_S2": C12D C13D J1D J3D LED2D Q1D Q3D Q6D R1D R2D R3D R4D R11D R12D R22D
component class Microcontroller_P: C1A C2A C3A C4A C5A C6A C7A C8A C9A C10A C11A D8A J5A J8A LED1A R5A R6A R7A R8A R9A R10A R37A SB2A SB3A SB6A TP1A TP2A TP3A TP4A TP5A TP6A TP7A TP8A TP9A TP10A TP11A TP13A TP16A U1A U2A U3A U6A
channel class Microcontroller: Microcontroller_P Microcontroller_S
net class "Primary Power Domain": GNDA NetJ1A_1 NetJ1A_2 NetJ1B_1 NetJ1B_2 NetJ3A_1 NetJ3B_1 NetLED2A_2 NetLED2B_2 NetQ1A_4 NetQ1B_4 PRIMARY_OUT_EN_1 PRIMARY_OUT_EN_2 PRIMARY_OUT_SENSE_1 PRIMARY_OUT_SENSE_2 PRIMARY_VBATT_1 PRIMARY_VBATT_2 PRIMARY_VBATT_SENSE_1 PRIMARY_VBATT_SENSE_2
net class "Secondary Power Domain": GNDB NetJ1C_1 NetJ1C_2 NetJ1D_1 NetJ1D_2 NetJ3C_1 NetJ3D_1 NetLED2C_2 NetLED2D_2 NetQ1C_4 NetQ1D_4 SECONDARY_OUT_EN_1 SECONDARY_OUT_EN_2 SECONDARY_OUT_SENSE_1 SECONDARY_OUT_SENSE_2 SECONDARY_VBATT_1 SECONDARY_VBATT_2 SECONDARY_VBATT_SENSE_1 SECONDARY_VBATT_SENSE_2
net class "Isolated Comms Domain": 9V_BATT CANHA CANLA ISO_5V ISO_5VA ISO_GND ISO_GNDA NetC14_1 NetC19_1 NetJ6_3 NetJ6_4
component class "U_Output Stages_P1": C12A C13A J1A J3A LED2A Q1A Q3A Q6A R1A R2A R3A R4A R11A R12A R22A
component class Microcontroller_S: C1B C2B C3B C4B C5B C6B C7B C8B C9B C10B C11B D8B J5B J8B LED1B R5B R6B R7B R8B R9B R10B R37B SB2B SB3B SB6B TP1B TP2B TP3B TP4B TP5B TP6B TP7B TP8B TP9B TP10B TP11B TP13B TP16B U1B U2B U3B U6B
channel class "Output Stages": "U_Output Stages_P1" "U_Output Stages_P2" "U_Output Stages_S1" "U_Output Stages_S2"
component class "U_Output Stages_S1": C12C C13C J1C J3C LED2C Q1C Q3C Q6C R1C R2C R3C R4C R11C R12C R22C
component class "U_Output Stages_P2": C12B C13B J1B J3B LED2B Q1B Q3B Q6B R1B R2B R3B R4B R11B R12B R22B
component class "Top Sheet": A1 C14 FID1 FID2 FID3 FID4 FID5 FID6 J2 R13 R14 Z1 Z2 Z4 Z5 Z6

## Components (designator, comment, footprint, x,y, rotation, side; value= is the part's Value field where it differs from the comment)
A1 "*" PCB -3.5,-33.25 r0 top
C1A "*" CAPC1608X08L 8.1,-11.6 r180 bottom value=100nF (schematic designator C1)
C1B "*" CAPC1608X08L 7.8,12.3 r180 top value=100nF (schematic designator C1)
C2A "*" CAPC1608X08L 7,-15.75 r270 top value=100nF (schematic designator C2)
C2B "*" CAPC1608X08L 6.75,15.75 r90 bottom value=100nF (schematic designator C2)
C3A "*" CAPC1608X08L 7,-18.5 r90 top value=100nF (schematic designator C3)
C3B "*" CAPC1608X08L 6.75,18.25 r270 bottom value=100nF (schematic designator C3)
C4A "*" CAPC1608X08L 7.6,-21.2 r270 top value=1uF (schematic designator C4)
C4B "*" CAPC1608X08L 7.375,20.5 r0 bottom value=1uF (schematic designator C4)
C5A "*" CAPC1608X08L 14.5,-4.25 r0 bottom value=100nF (schematic designator C5)
C5B "*" CAPC1608X08L 14.5,2 r0 bottom value=100nF (schematic designator C5)
C6A "*" CAPC2012X15M 16.25,-2.5 r0 bottom value=10uF (schematic designator C6)
C6B "*" CAPC2012X15M 15.025,4.25 r0 top value=10uF (schematic designator C6)
C7A "*" CAPC1608X08L 15.2,-13 r180 top value=100nF (schematic designator C7)
C7B "*" CAPC1608X08L 16,12.2 r180 bottom value=100nF (schematic designator C7)
C8A "*" CAPC1608X08L 10.8,-22.5 r90 bottom value=100nF (schematic designator C8)
C8B "*" CAPC1608X08L 5,25.1 r90 bottom value=100nF (schematic designator C8)
C9A "*" CAPC1608X08L 16.1,-19.7 r90 top value=100nF (schematic designator C9)
C9B "*" CAPC1608X08L 14.2,19.8 r0 bottom value=100nF (schematic designator C9)
C10A "*" CAPC1608X08L 5.7,-20.9 r90 bottom value=100nF (schematic designator C10)
C10B "*" CAPC1608X08L 11.4,22.2 r180 bottom value=100nF (schematic designator C10)
C11A "*" CAPC1608X08L -5.926,-19.326 r90 bottom value=100nF (schematic designator C11)
C11B "*" CAPC1608X08L -7,22.6 r90 bottom value=100nF (schematic designator C11)
C12A "*" CAPC1608X08L 4.975,-19.497 r90 top value=100nF (schematic designator C12)
C12B "*" CAPC1608X08L -8.25,-15.55 r90 top value=100nF (schematic designator C12)
C12C "*" CAPC1608X08L -4,19.5 r270 top value=100nF (schematic designator C12)
C12D "*" CAPC1608X08L -16,14.96 r270 top value=100nF (schematic designator C12)
C13A "*" CAPC1608X08L 4.725,-16.997 r180 top value=100nF (schematic designator C13)
C13B "*" CAPC1608X08L -8.5,-13.05 r180 top value=100nF (schematic designator C13)
C13C "*" CAPC1608X08L -3.75,17 r0 top value=100nF (schematic designator C13)
C13D "*" CAPC1608X08L -15.75,12.46 r0 top value=100nF (schematic designator C13)
C14 "*" CAPC1608X08L 18,4.6 r270 top value=100nF
C15 "*" CAPC1608X08L -51.4,28.7 r270 top value=100nF
C16 "*" CAPC1608X08L -47.6,19.4 r90 top value=100nF
C17 "*" CAPC2012X15M -49.5,21.775 r270 top value=10uF
C18 "*" CAPC1608X08L -58.1,19.6 r90 top value=100nF
C19 "*" CAPC1608X08L -47.1,12.3 r270 bottom value=100nF
D8A "*" SOT95P237X112-3M 10.05,-12.05 r180 top (schematic designator D8)
D8B "*" SOT95P237X112-3M 4.25,21.5 r0 bottom (schematic designator D8)
FID1 "*" FIDRT 32.5,-32.5 r90 bottom
FID2 "*" FIDRT 32.5,62.5 r90 bottom
FID3 "*" FIDRT -62.5,62.5 r90 bottom
FID4 "*" FIDRT 32.5,-32.5 r90 top
FID5 "*" FIDRT 32.5,62.5 r90 top
FID6 "*" FIDRT -62.5,62.5 r90 top
J1A "BATT IN P1" 39-31-0020 1.225,-21.497 r0 bottom (schematic designator J1)
J1B "BATT IN P2" 39-31-0020 -12,-17.55 r0 bottom (schematic designator J1)
J1C "BATT IN S1" 39-31-0020 -0.25,21.5 r180 bottom (schematic designator J1)
J1D "BATT IN S2" 39-31-0020 -12.25,16.96 r180 bottom (schematic designator J1)
J2 "Mag Con" B06B-PASK-1 20.1,0 r180 top
J3A "OUT P1" B2P-VH 1.475,-10.037 r270 top (schematic designator J3)
J3B "OUT P2" B2P-VH -11.75,-6.09 r270 top (schematic designator J3)
J3C "OUT S1" B2P-VH -0.5,10.04 r90 top (schematic designator J3)
J3D "OUT S2" B2P-VH -12.5,5.5 r90 top (schematic designator J3)
J4A "Ancillaries" FH12-10S-0_5SH -47.1,-25.2 r90 top (schematic designator J4)
J4B "Ancillaries" FH12-10S-0_5SH -47,-9.1 r90 top (schematic designator J4)
J5A "Ancillaries" FH12-10S-0_5SH -21.2,-7.95 r270 top (schematic designator J5)
J5B "Ancillaries" FH12-10S-0_5SH -21.2,7.95 r270 top (schematic designator J5)
J6 "CAN To Main PCB" B06B-PASK-1 -44.2,15.7 r90 top
J7A "Serial Debug" B04B-PASK-1 -56.8,-17.9 r0 top (schematic designator J7)
J7B "Serial Debug" B04B-PASK-1 -56.7,-1.8 r0 top (schematic designator J7)
J8A "TC2030-IDC TAG CONNECT PADS" TC2030-IDC-NL 10.79,-24.365 r180 top (schematic designator J8)
J8B "TC2030-IDC Tag Connect Pads" TC2030-IDC-NL 11.29,23.885 r180 top (schematic designator J8)
J9 "Serial Debug" B04B-PASK-1 -62.4,15.6 r90 top
LED1A "Visual Status Indicator" ASMB-MTB0-0A3A2 -6.5,-23 r180 top (schematic designator LED1)
LED1B "Visual Status Indicator" ASMB-MTB0-0A3A2 -6.25,23.5 r0 top (schematic designator LED1)
LED2A "ON" CAPCP2012X11N 4.225,-13.497 r90 bottom (schematic designator LED2)
LED2B "ON" CAPCP2012X11N -9,-9.55 r90 bottom (schematic designator LED2)
LED2C "ON" CAPCP2012X11N -3.25,13.5 r270 bottom (schematic designator LED2)
LED2D "ON" CAPCP2012X11N -15.25,8.96 r270 bottom (schematic designator LED2)
Q1A "*" MLPAK33_SOT8002-1_NEX-M -2.025,-18.247 r270 top (schematic designator Q1)
Q1B "*" MLPAK33_SOT8002-1_NEX-M -15.25,-14.3 r270 top (schematic designator Q1)
Q1C "*" MLPAK33_SOT8002-1_NEX-M 3,18.25 r90 top (schematic designator Q1)
Q1D "*" MLPAK33_SOT8002-1_NEX-M -9,13.71 r90 top (schematic designator Q1)
Q3A "BSS138" FAIR-SOT23-3_V -1.525,-13.497 r270 bottom (schematic designator Q3)
Q3B "BSS138" FAIR-SOT23-3_V -14.75,-9.55 r270 bottom (schematic designator Q3)
Q3C "BSS138" FAIR-SOT23-3_V 2.5,13.5 r90 bottom (schematic designator Q3)
Q3D "BSS138" FAIR-SOT23-3_V -9.5,8.96 r90 bottom (schematic designator Q3)
Q6A "Reverse Polarity Protection" MLPAK33_SOT8002-1_NEX-M -2.025,-22.747 r90 top (schematic designator Q6)
Q6B "Reverse Polarity Protection" MLPAK33_SOT8002-1_NEX-M -15.25,-18.8 r90 top (schematic designator Q6)
Q6C "Reverse Polarity Protection" MLPAK33_SOT8002-1_NEX-M 3,22.75 r270 top (schematic designator Q6)
Q6D "Reverse Polarity Protection" MLPAK33_SOT8002-1_NEX-M -9,18.21 r270 top (schematic designator Q6)
R1A "RESISTOR" RESC1608X06L -2.725,-18.537 r90 bottom value=10K (schematic designator R1)
R1B "RESISTOR" RESC1608X06L -15.95,-14.59 r90 bottom value=10K (schematic designator R1)
R1C "RESISTOR" RESC1608X06L 3.7,18.54 r270 bottom value=10K (schematic designator R1)
R1D "RESISTOR" RESC1608X06L -8.3,14 r270 bottom value=10K (schematic designator R1)
R2A "*" RESC1608X06L 1.275,-21.037 r180 top value=30K (schematic designator R2)
R2B "*" RESC1608X06L -11.95,-17.09 r180 top value=30K (schematic designator R2)
R2C "*" RESC1608X06L -0.3,21.04 r0 top value=30K (schematic designator R2)
R2D "*" RESC1608X06L -12.3,16.5 r0 top value=30K (schematic designator R2)
R3A "RESISTOR" RESC1608X06L -1.775,-10.747 r180 bottom value=1K (schematic designator R3)
R3B "RESISTOR" RESC1608X06L -15,-6.8 r180 bottom value=1K (schematic designator R3)
R3C "RESISTOR" RESC1608X06L 2.75,10.75 r0 bottom value=1K (schematic designator R3)
R3D "RESISTOR" RESC1608X06L -9.25,6.21 r0 bottom value=1K (schematic designator R3)
R4A "*" RESC1608X06L 3.725,-19.497 r270 top value=10K (schematic designator R4)
R4B "*" RESC1608X06L -9.5,-15.55 r270 top value=10K (schematic designator R4)
R4C "*" RESC1608X06L -2.75,19.5 r90 top value=10K (schematic designator R4)
R4D "*" RESC1608X06L -14.75,14.96 r90 top value=10K (schematic designator R4)
R5A "*" RESC1608X06L -5,-26 r180 top value=20R (schematic designator R5)
R5B "*" RESC1608X06L -8.5,24.25 r90 top value=20R (schematic designator R5)
R6A "*" RESC1608X06L -8.75,-23.95 r270 top value=20R (schematic designator R6)
R6B "*" RESC1608X06L -4,24.5 r90 top value=20R (schematic designator R6)
R7A "*" RESC1608X06L -7.25,-19.25 r270 top value=120R (schematic designator R7)
R7B "*" RESC1608X06L -5.5,19.75 r90 top value=120R (schematic designator R7)
R8A "RESISTOR" RESC1608X06L 13.1,-22 r180 bottom value=4K7 (schematic designator R8)
R8B "RESISTOR" RESC1608X06L 14,21.7 r270 bottom value=4K7 (schematic designator R8)
R9A "RESISTOR" RESC1608X06L 17.35,-19.15 r270 top value=4K7 (schematic designator R9)
R9B "RESISTOR" RESC1608X06L 17.9,18.7 r90 top value=4K7 (schematic designator R9)
R10A "RESISTOR" RESC1608X06L 15.7,-14.4 r180 top value=10K (schematic designator R10)
R10B "RESISTOR" RESC1608X06L 16.6,14.2 r270 bottom value=10K (schematic designator R10)
R11A "*" RESC1608X06L 4.725,-8.497 r180 top value=30K (schematic designator R11)
R11B "*" RESC1608X06L -8.5,-4.55 r180 top value=30K (schematic designator R11)
R11C "*" RESC1608X06L -3.75,8.5 r0 top value=30K (schematic designator R11)
R11D "*" RESC1608X06L -15.75,3.96 r0 top value=30K (schematic designator R11)
R12A "*" RESC1608X06L 4.725,-15.747 r0 top value=10K (schematic designator R12)
R12B "*" RESC1608X06L -8.5,-11.8 r0 top value=10K (schematic designator R12)
R12C "*" RESC1608X06L -3.75,15.75 r180 top value=10K (schematic designator R12)
R12D "*" RESC1608X06L -15.75,11.21 r180 top value=10K (schematic designator R12)
R13 "Line Termination" RESC1608X06L 19.4,4.6 r270 top value=62R
R14 "*" RESC1608X06L 20.7,4.6 r270 top value=62R
R15 "RESISTOR" RESC1608X06L -59.4,18.9 r90 bottom value=10K
R16 "*" RESC1608X06L -46.4,14.7 r0 bottom value=62R
R17 "Line Termination" RESC1608X06L -46.4,16.7 r0 bottom value=62R
R22A "*" RESC1608X06L 4.225,-10.497 r90 bottom value=560R (schematic designator R22)
R22B "*" RESC1608X06L -9,-6.55 r90 bottom value=560R (schematic designator R22)
R22C "*" RESC1608X06L -3.25,10.5 r270 bottom value=560R (schematic designator R22)
R22D "*" RESC1608X06L -15.25,5.96 r270 bottom value=560R (schematic designator R22)
R37A "RESISTOR" RESC1608X06L -23.5,-8.25 r90 bottom value=10K (schematic designator R37)
R37B "RESISTOR" RESC1608X06L -22.2,8.9 r90 bottom value=10K (schematic designator R37)
SB1A "Solder Blob Closed" 0603SOLDERLINKCLOSED -55.8,-20.8 r270 bottom (schematic designator SB1)
SB1B "Solder Blob Closed" 0603SOLDERLINKCLOSED -55.7,-4.7 r270 bottom (schematic designator SB1)
SB2A "Solder Blob Closed" 0603SOLDERLINKCLOSED 18.2,-17.3 r0 top (schematic designator SB2)
SB2B "Solder Blob Closed" 0603SOLDERLINKCLOSED 20.6,15.012 r270 bottom (schematic designator SB2)
SB3A "Solder Blob Closed" 0603SOLDERLINKCLOSED 18.2,-15.7 r0 top (schematic designator SB3)
SB3B "Solder Blob Closed" 0603SOLDERLINKCLOSED 18.9,15.012 r270 bottom (schematic designator SB3)
SB4A "Solder Blob Closed" 0603SOLDERLINKCLOSED -57.8,-20.85 r270 bottom (schematic designator SB4)
SB4B "Solder Blob Closed" 0603SOLDERLINKCLOSED -57.7,-4.75 r270 bottom (schematic designator SB4)
SB5 "Solder Blob Closed" 0603SolderLinkClosed -59.7,16.5 r0 bottom
SB6A "Primary = Open, Secondary = Closed" 0603SOLDERLINKOPEN 18.3,-11.1 r180 bottom (schematic designator SB6)
SB6B "Primary = Open, Secondary = Closed" 0603SOLDERLINKOPEN 19.1,12.9 r180 top (schematic designator SB6)
SB7 "Solder Blob Closed" 0603SolderLinkClosed -59.7,14.9 r0 bottom
SW1A "Boot" SW_KSR -55,-26 r90 top (schematic designator SW1)
SW1B "Boot" SW_KSR -54.9,-9.9 r90 top (schematic designator SW1)
SW2A "RESET" SW_KSR -59.5,-26 r90 top (schematic designator SW2)
SW2B "RESET" SW_KSR -59.4,-9.9 r90 top (schematic designator SW2)
TP1A "GND" S1751-46R -19.3,-16.8 r135 top (schematic designator TP1)
TP1B "GND" S1751-46R -19.3,16.8 r45 bottom (schematic designator TP1)
TP2A "GND" S1751-46R -19.3,-16.8 r315 bottom (schematic designator TP2)
TP2B "GND" S1751-46R -19.3,16.8 r45 top (schematic designator TP2)
TP3A "TMS" TP1 6.6,-10 r90 top (schematic designator TP3)
TP3B "TMS" TP1 16.2,11.7 r90 top (schematic designator TP3)
TP4A "TMS" TP1 18.8,-13.5 r90 bottom (schematic designator TP4)
TP4B "TMS" TP1 19.775,14.65 r90 top (schematic designator TP4)
TP5A "TMS" TP1 19.9,-16.4 r90 bottom (schematic designator TP5)
TP5B "TMS" TP1 16.5,17.5 r90 bottom (schematic designator TP5)
TP6A "TMS" TP1 18.8,-17.4 r90 bottom (schematic designator TP6)
TP6B "TMS" TP1 16.5,19 r90 bottom (schematic designator TP6)
TP7A "TMS" TP1 8.1,-10 r90 top (schematic designator TP7)
TP7B "TMS" TP1 12.4,12 r90 bottom (schematic designator TP7)
TP8A "TMS" TP1 19.9,-14.7 r90 bottom (schematic designator TP8)
TP8B "TMS" TP1 18.1,15.5 r90 top (schematic designator TP8)
TP9A "TMS" TP1 21.2,-15.5 r90 bottom (schematic designator TP9)
TP9B "TMS" TP1 19.75,16.337 r90 top (schematic designator TP9)
TP10A "TMS" TP1 8.3,-20.1 r90 bottom (schematic designator TP10)
TP10B "TMS" TP1 7.3,25.7 r90 bottom (schematic designator TP10)
TP11A "TMS" TP1 3.7,-25.5 r90 top (schematic designator TP11)
TP11B "TMS" TP1 5.5,18.5 r90 top (schematic designator TP11)
TP13A "TMS" TP1 15.6,-21.6 r90 top (schematic designator TP13)
TP13B "TMS" TP1 15.4,21.5 r90 bottom (schematic designator TP13)
TP14 "+9V" POST-Red -55,30 r90 top
TP15 "0V" POST-Black -59,30 r90 top
TP16A "GND" S1751-46R 24.25,-3.5 r180 bottom (schematic designator TP16)
TP16B "GND" S1751-46R 24.25,4.5 r180 top (schematic designator TP16)
TP17 "TMS" TP1 -42.3,16.7 r0 bottom
TP18 "TMS" TP1 -42.3,14.7 r0 bottom
TP19 "TMS" TP1 -57.7,18.3 r0 bottom
TP20 "TMS" TP1 -58.8,13 r0 bottom
TP21 "GND" S1751-46R -62,8 r0 bottom
TP22 "GND" S1751-46R -44,8 r180 bottom
U1A "Power On Reset" SOT95P280X145-5L 8.2,-22.5 r180 bottom (schematic designator U1)
U1B "Power On Reset" SOT95P280X145-5L 8.75,23.25 r90 bottom (schematic designator U1)
U2A "MIC5200-3.3YS" FP-SOT223-3LD-PL-1-IPC_C 11.5,-17.25 r0 top (schematic designator U2)
U2B "MIC5200-3.3YS" FP-SOT223-3LD-PL-1-IPC_C 11.175,17 r0 bottom (schematic designator U2)
U3A "CAN Transceiver" FP-DWV0008A-IPC_C 20.035,-8.601 r90 top (schematic designator U3)
U3B "CAN Transceiver" FP-DWV0008A-IPC_C 20,7 r270 bottom (schematic designator U3)
U4 "5V Regulator" SOT230P700X170-4M -45.8,27.5 r0 top
U5 "CAN Transceiver" FP-DWV0008A-IPC_C -52.8,15.7 r0 top
U6A "Microcontroller" FP-LQFP32-5V-MFG 13,-16 r90 bottom (schematic designator U6)
U6B "Microcontroller" FP-LQFP32-5V-MFG 12.25,16.75 r270 top (schematic designator U6)
Z1 "*" "Breakout - 3 hole - short route" -42,-14.6 r90 top
Z2 "*" "Breakout - 3 hole - short route" -53.5,4 r180 top
Z4 "*" "Breakout - 3 hole - short route" -51,32 r180 top
Z5 "*" "Breakout - 3 hole - short route" -41,20 r90 top
Z6 "*" "Breakout - 3 hole - short route" -53.5,6 r0 top

## Footprints (in the part's own frame and the unit in brackets; to place one, negate y for a bottom-side part, rotate by r counter-clockwise, add the part's x,y. Pads: shape width x height; smd on the part's side, far side on the other; paste and mask are expansions set on the pad)
39-31-0020 [mm] "Molex: 2W Mini-Fit Connector"
  round 2.4 hole 1.4: 1(0,2.75) 2(0,-2.75)
  silkscreen extent -3.35,-6.3 3.2,5.05, body extent -3.1,-6.2 3.1,4.8, height 12.81
0603SOLDERLINKCLOSED [mm] "0603 Solder Link - Closed"
  rect 0.5x1 smd paste-0.5: 1(-1.05,0) 2(1.05,0)
  round 0.025 smd: 1(-0.587,0) 2(0.612,0)
  Top Layer region: 1.3,-0.5 -0.075,-0.5 0.425,0 -0.075,0.5 1.3,0.5
  Top Layer region: -1.3,0.5 -0.375,0.5 0.125,0 -0.375,-0.5 -1.3,-0.5
  silkscreen extent -1.6,-0.8 1.6,0.8, body extent -0.85,-0.48 0.85,0.47, height 0.55
0603SolderLinkClosed [mm] "0603 Solder Link - Closed"
  rect 0.5x1 smd paste-0.5: 1(-1.05,0) 2(1.05,0)
  round 0.025 smd: 1(-0.587,0) 2(0.612,0)
  Top Layer region: 1.3,-0.5 -0.075,-0.5 0.425,0 -0.075,0.5 1.3,0.5
  Top Layer region: -1.3,0.5 -0.375,0.5 0.125,0 -0.375,-0.5 -1.3,-0.5
  silkscreen extent -1.6,-0.8 1.6,0.8, body extent -0.85,-0.48 0.85,0.47, height 0.55
0603SOLDERLINKOPEN [mm] "0603 Solder Link - Open"
  rect 0.5x1 smd paste-0.5 mask+0.102: 1(-1.05,0)
  round 0.025 smd: 1(-0.587,0) 2(0.612,0)
  rect 0.5x1 smd paste-0.5: 2(1.05,0)
  Top Layer region: 1.3,-0.5 -0.075,-0.5 0.425,0 -0.075,0.5 1.3,0.5
  Top Layer region: -1.3,0.5 -0.375,0.5 0.125,0 -0.375,-0.5 -1.3,-0.5
  silkscreen extent -1.6,-0.8 1.6,0.8
ASMB-MTB0-0A3A2 [mm] "PLCC-4 Tricolor Black Surface LED"
  rect 1.1x1.5 smd: 1(-0.75,-1.5) 2(-0.75,1.5) 3(0.75,1.5) 4(0.75,-1.5)
  silkscreen extent -1.75,-1.7 1.2,0.55, body extent -1.4,-1.75 1.4,1.75, height 1.91
B2P-VH [mil] "Connector JST VH series 2 way 3.96mm pitch"
  rect 112x112 hole 64.96: 1(0,0)
  round 112 hole 64.96: 2(155.91,0)
  silkscreen extent -77,-190 233,144, body extent -77,-190 232,145, height 430
B04B-PASK-1 [mm] "JST B04B-PASK-1 2mm Connector"
  round 1.6 hole 0.87: 1(3,0) 2(1,0) 3(-1,0) 4(-3,0)
  round 0 hole 1.1 unplated: 11(4.5,1.7)
  silkscreen extent -5,-3.1 5,2.2, body extent -5,-3.1 5,2.2, height 7.7
B06B-PASK-1 [mm] "JST B07B-PASK-1 2mm Connector"
  round 1.6 hole 0.87: 1(5,0) 2(3,0) 3(1,0) 4(-1,0) 5(-3,0) 6(-5,0)
  round 0 hole 1.1 unplated: 11(6.5,1.7)
  silkscreen extent -7,-3.1 7,2.2, body extent -7,-3.1 7,2.2, height 7.72
"Breakout - 3 hole - short route" [mm]
  round 0 hole 0.8 unplated: 1(-1.2,0.2) 2(0,0.2) 3(1.2,0.2)
CAPC1608X08L [mm] "Chip Capacitor, 2-Leads, Body 1.6x0.8mm, IPC High Density"
  rect 0.85x0.8 smd: 1(-0.625,0) 2(0.625,0)
  body extent -0.8,-0.43 0.8,0.43, height 0.8
CAPC2012X15M [mm] "Chip Capacitor, 2-Leads, Body 2.0x1.3mm, IPC Low Density"
  rect 1.55x1.6 smd: 1(-0.975,0) 2(0.975,0)
  silkscreen extent -2.17,-1.25 2.17,1.25, body extent -1,-0.64 1,0.63, height 1.47
CAPCP2012X11N [mm] "Chip Capacitor, 2-Leads, Body 2.0x1.3mm, IPC Medium Density"
  rect 1.1x1.4 smd: 1(-0.95,0) 2(0.95,0)
  silkscreen extent -2.04,-1.02 1.78,1.02, body extent -1,-0.63 1,0.64, height 1.12
FAIR-SOT23-3_V [mm] "SOT23, 3-Leads, Body 3.12x1.5mm, Pitch 0.95mm"
  rect 1.4x1 smd: 1(-1.1,0.95) 2(-1.1,-0.95) 3(1.1,0)
  silkscreen extent -1.22,-1.55 0.75,2.12, body extent -1.35,-1.56 1.35,1.56, height 1.2
FH12-10S-0_5SH [mm] "Hirose FH12 Series 10W FFC 0.5mm pitch connector"
  rect 1.8x2.2 smd: 0(-4.15,0) 0(4.15,0)
  rect 0.3x1.3 smd: 1(-2.25,3.25) 2(-1.75,3.25) 3(-1.25,3.25) 4(-0.75,3.25) 5(-0.25,3.25) 6(0.25,3.25) 7(0.75,3.25) 8(1.25,3.25) 9(1.75,3.25) 10(2.25,3.25)
  silkscreen extent -4.05,-3 4.05,3.23, body extent -4.55,-3 4.55,3.4, height 2.11
FIDRT [mil] "Fiducial 1mm round"
  round 40 smd paste-19.68 mask+20: 0(0,0)
  Top Layer keep-out circle w3.94: c0,0 r39.37
FP-DWV0008A-IPC_C [mm]
  rect 1.654x0.542 smd paste+0 mask+0: 1(-5.201,1.905)
  rrect100% 1.654x0.542 smd paste+0 mask+0: 2(-5.201,0.635) 3(-5.201,-0.635) 4(-5.201,-1.905) 5(5.201,-1.905) 6(5.201,-0.635) 7(5.201,0.635) 8(5.201,1.905)
  silkscreen extent -6.93,-2.93 3.87,2.93, body extent -6.13,-3.03 6.13,3.03, height 0.25
FP-LQFP32-5V-MFG [mm]
  rect 1.2x0.5 smd paste+0 mask+0: 1(-4.25,2.8) 2(-4.25,2) 3(-4.25,1.2) 4(-4.25,0.4) 5(-4.25,-0.4) 6(-4.25,-1.2) 7(-4.25,-2) 8(-4.25,-2.8) 17(4.25,-2.8) 18(4.25,-2) 19(4.25,-1.2) 20(4.25,-0.4) 21(4.25,0.4) 22(4.25,1.2) 23(4.25,2) 24(4.25,2.8)
  rect 0.5x1.2 smd paste+0 mask+0: 9(-2.8,-4.25) 10(-2,-4.25) 11(-1.2,-4.25) 12(-0.4,-4.25) 13(0.4,-4.25) 14(1.2,-4.25) 15(2,-4.25) 16(2.8,-4.25) 25(2.8,4.25) 26(2,4.25) 27(1.2,4.25) 28(0.4,4.25) 29(-0.4,4.25) 30(-1.2,4.25) 31(-2,4.25) 32(-2.8,4.25)
  silkscreen extent -5.57,-3.6 3.6,3.6, body extent -4.5,-4.5 4.5,4.5, height 1.6
FP-SOT223-3LD-PL-1-IPC_C [mm]
  rect 1.454x0.882 smd paste+0 mask+0: 1(-3.075,2.3)
  rrect100% 1.454x0.882 smd paste+0 mask+0: 2(-3.075,0) 3(-3.075,-2.3)
  rrect61% 1.454x3.182 smd paste+0 mask+0: 4(3.075,0)
  silkscreen extent -4.45,-3.25 1.6,3.25, body extent -3.5,-3.25 3.53,3.25, height 1.8
MLPAK33_SOT8002-1_NEX-M [mil]
  rect 32x12 smd paste+0 mask+0: 1(-69,38.39) 2(-69,12.8) 3(-69,-12.8) 4(-69,-38.39) 5(69,-38.39) 6(69,-12.8) 7(69,12.8) 8(69,38.39)
  Top Layer region: 57.98,-52 57.98,52 -32,52 -32,-52
  silkscreen extent -105,-69 66,69, body extent -69,-64 69,64, height 35
PCB [mm] "BOM Entry for PCB"
POST-Black [mil] "Test point post - Black"
  round 70 hole 40: 1(0,0)
  silkscreen extent -50,-50 50,50, body extent -50,-50 50,50, height 180
POST-Red [mil] "Test point post - Red"
  round 70 hole 40: 1(0,0)
  silkscreen extent -50,-50 50,50, body extent -50,-50 50,50, height 180
RESC1608X06L [mm] "Chip Resistor, 2-Leads, Body 1.6x0.8mm, IPC High Density"
  rect 0.8x0.9 smd: 1(-0.7,0) 2(0.7,0)
  silkscreen extent -0.1,-0.35 0.1,0.35, body extent -0.85,-0.48 0.85,0.48, height 0.55
S1751-46R [mm] "SM Testpoint - Harwin S1751-46R"
  rect 3.45x1.85 smd: 1(0,0)
  silkscreen extent -1.9,-1.1 1.9,1.1, body extent -1.58,-0.8 1.67,0.85, height 2
SOT95P237X112-3M [mm] "SOT23, 3-Leads, Body 3.0x2.6mm (max), Pitch 0.95mm, IPC Low Density"
  rect 1.9x0.6 smd: 1(-0.95,0.95) 2(-0.95,-0.95) 3(0.95,0)
  silkscreen extent -1.08,-1.5 0.7,1.92, body extent -1.25,-1.5 1.25,1.5, height 1.09
SOT95P280X145-5L [mm] "SOT23, 5-Leads, Body 3.0x3.0mm (max), Pitch 0.95mm, IPC High Density"
  rect 0.9x0.6 smd: 1(-1.2,0.95) 2(-1.2,0) 3(-1.2,-0.95) 4(1.2,-0.95) 5(1.2,0.95)
  silkscreen extent -1.7,-1.5 0.35,1.7, body extent -1.6,-1.55 1.6,1.55, height 1.45
SOT230P700X170-4M [mm] "SOT223, 4-Leads, Body 6.7x7.3mm (max), Pitch 2.30mm, IPC Low Density"
  rect 2.7x0.9 smd: 1(-2.95,2.3) 2(-2.95,0) 3(-2.95,-2.3)
  rect 2.7x3.3 smd: 4(2.95,0)
  silkscreen extent -3.05,-3.35 1.2,3.35, body extent -3.48,-3.25 3.48,3.25, height 1.69
SW_KSR [mm] "Switch SMD SPST-NO Vertical ITT/Cannon KSR231GLFS"
  rect 1x1.4 smd: 1(-3.5,0) 2(3.5,0)
  silkscreen extent -3,-1.9 3,1.9, body extent -3.65,-1.95 3.65,1.95, height 2.5
TC2030-IDC-NL [mm] "Tag-Connect 6-Pin with no legs (PN# TC2030-IDC-NL)"
  round 0.9 hole 0.995: 0(0,0) 0(5.08,-1.016) 0(5.08,1.016)
  round 0.79 smd paste-0.39: 1(1.27,-0.635) 2(1.27,0.635) 3(2.54,-0.635) 4(2.54,0.635) 5(3.81,-0.635) 6(3.81,0.635)
  silkscreen extent -0.64,-1.91 5.71,1.91
TP1 [mm]
  round 1 smd paste-0.5: 1(0,0)

## Part data
A1: library part "Misc PCB", "PCB (Bare Board)", Supplier Part Number 1="KDA Rev A", Class="PCB BOM Entry", Created=31/05/2013, Last_Updated=31/05/2013, Source="Misc PCB"
C1A C1B C2A C2B C3A C3B C5A C5B C7A C7B C8A C8B C9A C9B C10A C10B C11A C11B C12A C12B C12C C12D C13A C13B C13C C13D C14 C15 C16 C18 C19: library part FEC882-0023, "Capacitor MLC 100nF 50V X7R 10% CAPC1608X08M", Dielectric=X7R, Manufacturer=Murata, ManuPartNo=GRM188R71H104KA93D, Supplier Part Number 1=8820023, Tolerance=10%, Voltage=50V, Class="Capacitor MLC", Cost 1+=0.064, Cost 1K+=0.039, Created=25/01/2013, Last_Updated=25/01/2013, Life=V, RoHS=Y, Source=FEC882-0023, Supplier 1=Farnell
C4A C4B: library part FEC3013414, "Capacitor MLC 1uF 25V X7R 10% CAPC1608X08M", Dielectric=X7R, Manufacturer=Samsung, ManuPartNo=CL10B105KA8NFNC, Supplier Part Number 1=3013414, Tolerance=10%, Voltage=25V, Class="Capacitor MLC", ComponentLink1Description=Datasheet, ComponentLink1URL="C:\Altium SANDBOX\Component Database\Datasheet\2710598.pdf", Cost 1+=0.0261, Cost 1K+=0.0112, Created=11/05/2021, Last_Updated=11/05/2021, Life=V, RoHS=Y, Source=FEC3013414, Supplier 1=Farnell
C6A C6B C17: library part Mouser81-GRM21BR71A106KE51, "Capacitor MLC 10uF10V X7R 10% CAPC2012X15M", Dielectric=X7R, Manufacturer=Murata, ManuPartNo=GRM21BR71A106KE51L, Supplier Part Number 1=81-GRM21BR71A106KE51, Tolerance=10%, Voltage=10V, Class="Capacitor MLC", Cost 1+=0.189, Cost 1K+=0.046, Created=21/12/2016, Last_Updated=21/12/2016, Life=V, RoHS=Y, Source=Mouser81-GRM21BR71A106KE51, Supplier 1=Mouser
D8A D8B: library part FEC146-7518, "Diode Schottky BAT54C SOT-23", Manufacturer=Fairchild, ManuPartNo=BAT54C, Supplier Part Number 1=1467518, Class="Diode Schottky", ComponentLink1Description=Datasheet, ComponentLink1URL="C:\Altium SANDBOX\Component Database\Datasheet\BAT54 Fairchild.pdf", Cost 1+=0.117, Cost 1K+=0.0297, Created=16/12/2013, If (mA)=200, Last_Updated=26/06/2018, Life=V, Ptot (mW)=290, RoHS=Y, Source=FEC146-7518, Supplier 1=Farnell, Vf=0.8V, Vr (V)=30V
FID1 FID2 FID3 FID4 FID5 FID6: library part "Misc FIDT", "Fiducial 1mm Dot Component Side", Supplier Part Number 1=FIDT, Class="Fiducial Dot", Created=31/05/2013, Last_Updated=31/05/2013, Source="Misc FIDT", Supplier 1=Misc
J1A J1B J1C J1D: library part FEC1756696, "Connector 2 Way Mini-Fit 5566 Series", Manufacturer=Molex, ManuPartNo=39-31-0020, Supplier Part Number 1=1756696, Class=Connector, ComponentLink1Description=Datasheet, ComponentLink1URL="C:\Altium SANDBOX\Component Database\Datasheet\39-31-0020.pdf", Cost 1+=0.39, Cost 1K+=0.283, Created=06/02/2018, Last_Updated=06/02/2018, Life=V, Orient=Vertical, Pin Count=2, RoHS=Y, Source=FEC1756696, Supplier 1=Farnell
J2 J6: library part FEC183-0743, "Connector 6 Way Vertical B06B-PASK-1 (LF) (SN) 2mm Pitch", Manufacturer=JST, ManuPartNo="B06B-PASK-1 (LF) (SN)", Supplier Part Number 1=1830743, Class=Connector, Cost 1+=0.55, Cost 1K+=0.2, Created=21/06/2013, Last_Updated=21/06/2013, Life=V, Orient=Vertical, Pin Count=6, Pitch=2mm, RoHS=Y, Source=FEC183-0743, Supplier 1=Farnell
J3A J3B J3C J3D: library part FEC949-2003, "Connector 2 Way Vertical JST B2P-VH(LF)(SN) 3.96mm Pitch", Manufacturer=JST, ManuPartNo=B2P-VH(LF)(SN), Supplier Part Number 1=9492003, Class=Connector, Cost 1+=0.128, Cost 1K+=0.074, Created=13/06/2013, Last_Updated=13/06/2013, Life=V, Orient#=Vertical, Pin Count=2, Pitch=3.96mm, RoHS=Y, Source=FEC949-2003, Supplier 1=Farnell
J4A J4B J5A J5B: library part FEC1324540, "Connector 10W FFC/FPC 0.5mm SM ZIF", Manufacturer=Hirose, ManuPartNo=FH12-10S-0.5SH(55), Supplier Part Number 1=1324540, Class=Connector, ComponentLink1Description=Datasheet, ComponentLink1URL="C:\Altium SANDBOX\Component Database\Datasheet\Hirose FH12 Series.pdf", Cost 1+=1.02, Cost 1K+=0.563, Created=28/02/2020, Last_Updated=28/02/2020, Life=V, Orient=Horizontal, Pin Count=10, RoHS=Y, Source=FEC1324540, Supplier 1=Farnell
J7A J7B J9: library part RS512-8608, "Connector 4 Way Vertical JST B04B-PASK-1 (LF) (SN) 2mm Pitch", Manufacturer=JST, ManuPartNo="B04B-PASK-1 (LF) (SN)", Supplier Part Number 1=512-8608, Class=Connector, Cost 1+=0.26, Cost 1K+=0.24, Created=05/06/2013, Last_Updated=05/06/2013, Life=V, Orient=Vertical, Pin Count=4, Pitch=2mm, RoHS=Y, Source=RS512-8608, Supplier 1=RSComponents
J8A J8B: library part TC2030-IDC-NL, "TC2030 Tag Connect Programmer Connection - Non BOM part", Manufacturer="Tag Connect", ComponentLink1Description=Datasheet, ComponentLink1URL="C:\Altium SANDBOX\Component Database\Datasheet\TC2030-CTX.pdf", Created=28/09/2025, Last_Updated=28/09/2025, Life=V, Orient=Vertical, Pin Count=6, RoHS=Y, Source=TC2030-IDC-NL
LED1A LED1B: library part FEC2401105, "LED RGB, SMD, 2.4mm, 115 °", Manufacturer=Wurth, ManuPartNo=ASMB-MTB0-0A3A2, Supplier Part Number 1=2401105, Class=LED, ComponentLink1Description=Datasheet, ComponentLink1URL="C:\Altium SANDBOX\Component Database\Datasheet\2343968.pdf", Cost 1+=0.278, Cost 1K+=0.141, Created=09/03/2018, IF Max (mA)=20, IF Typ (mA)=20, Last_Updated=09/03/2018, Life=V, RoHS=Y, Source=FEC2401105, Supplier 1=Farnell, View Angle=115
LED2A LED2B LED2C LED2D: library part RS692-0907, "LED 2.0x1.25mm GREEN 0805 LTST-C170KGKT", Manufacturer=Liteon, ManuPartNo=LTST-C170KGKT, Supplier Part Number 1=692-0907, Class="LED 0805 Green", ComponentLink1Description=Datasheet, ComponentLink1URL="C:\Altium SANDBOX\Component Database\Datasheet\LTST-C170KGKT.pdf", Cost 1+=0.169, Cost 1K+=0.071, Created=05/08/2013, IF Max (mA)=80, IF Typ (mA)=30, Last_Updated=05/08/2013, Life=V, RoHS=Y, Source=RS692-0907, Supplier 1=RSComponents, View Angle=130
Q1A Q1B Q1C Q1D Q6A Q6B Q6C Q6D: library part FEC3934789, "Power MOSFET, P Channel, 30 V, 15.2 A, 0.0111 ohm, MLPAK33, Surface Mount", Manufacturer=NEXPERIA, ManuPartNo=PXP012-30QLJ, Supplier Part Number 1=3934789, Class="Transistor MOSFET P", ComponentLink1Description=Datasheet, ComponentLink1URL="C:\Altium SANDBOX\Component Database\Datasheet\3679934.pdf", Cost 1+=0.598, Cost 1K+=0.207, Created=24/09/2025, Id=8.9, Last_Updated=24/09/2025, Life=V, Pd (mW)=1700, Rds(on)=0.0111, RoHS=Y, Source=FEC3934789, Supplier 1=Farnell, Vds=30, Vgs=25
Q3A Q3B Q3C Q3D: library part CMP-013-00021-3, "N-Channel Logic Level Enhancement Mode Field Effect Transistor, 220 mA, 50 V, -55 to 150 degC, 3-Pin SOT-23, RoHS, Tape and Reel", Case/Package=TO-236-3, Input Capacitance=27pF, Manufacturer=Fairchild, Max Operating Temperature=150°C, Min Operating Temperature=-55°C, Nominal Dual Supply Voltage=50V, Package Description="3-Pin Small Outline Transistor, Body 2.92 x 1.325 mm, Pitch 0.95 mm", Package Quantity=1, Package Reference=SOT23-3, Package Version="Rev. 12, 03/2016", Power=360mW, Resistance=0.7Ohm, Datasheet URL=https://www.fairchildsemi.com/datasheets/BS/BSS138.pdf, Datasheet Version="Rev. C, 10/2005", Elements=1, Mounting Technology=SM, Nominal Vgs=1.3V, Packaging=TapeandReel, Pins=3, Rds On Max=3.5Ohm, RoHS Compliant=True, Typical Rise Time=9ns
R1A R1B R1C R1D R4A R4B R4C R4D R10A R10B R12A R12B R12C R12D R15 R37A R37B: library part PanasonicERA3AEB103V, "SMD Chip Resistor, Thin Film, 10 kohm, 75 V, 0603 [1608 Metric], 100 mW, ± 0.1%, ERA3A Series", Manufacturer=Panasonic, ManuPartNo=ERA3AEB103V, Power=100mW, Supplier Part Number 1=1577619, Tolerance=0.1%, Voltage=75V, Class=Resistor, ComponentLink1Description=Datasheet, ComponentLink1URL="C:\Altium SANDBOX\Component Database\Datasheet\Panasonic Resistors.pdf", Cost 1+=0.237, Cost 1K+=0.053, Created=27/02/2018, Last_Updated=27/02/2018, Life=V, RoHS=Y, Source=PanasonicERA3AEB103V, Supplier 1=Farnell
R2A R2B R2C R2D R11A R11B R11C R11D: library part PanasonicERA3AEB303V, "SMD Chip Resistor, Thin Film, 30 kohm, 75 V, 0603 [1608 Metric], 100 mW, ± 0.1%, ERA3A Series", Manufacturer=Panasonic, ManuPartNo=ERA3AEB303V, Power=100mW, Supplier Part Number 1=1670196, Tolerance=0.1%, Voltage=75V, Class=Resistor, ComponentLink1Description=Datasheet, ComponentLink1URL="C:\Altium SANDBOX\Component Database\Datasheet\Panasonic Resistors.pdf", Cost 1+=0.0538, Cost 1K+=0.0349, Created=19/09/2025, Last_Updated=19/09/2025, Life=V, RoHS=Y, Source=PanasonicERA3AEB303V, Supplier 1=Farnell
R3A R3B R3C R3D: library part FEC2421849, "SMD Chip Resistor, Thick Film, 1 kohm, 50 V, 0603 [1608 Metric], 100 mW, ± 1%, RC Series", Manufacturer=Yageo, ManuPartNo=RC0603FR-071KL, Power=100mW, Supplier Part Number 1=2421849, Tolerance=1%, Voltage=50V, Class=Resistor, ComponentLink1Description=Datasheet, ComponentLink1URL="C:\Altium SANDBOX\Component Database\Datasheet\Yageo RC_L Series.pdf", Cost 1+=0.002, Cost 1K+=0.001, Created=22/05/2018, Last_Updated=22/05/2018, Life=V, RoHS=Y, Source=FEC2421849, Supplier 1=Farnell
R5A R5B R6A R6B: library part FEC933-0798, "Resistor 20R 1% 50V RESC1608X06M", Manufacturer=Multicomp, ManuPartNo="MC 0.063W 0603 1% 20R", Supplier Part Number 1=9330798, Tolerance=1%, Voltage=50V, Class=Resistor, Cost 1+=0.021, Cost 1K+=0.015, Created=23/01/2013, Last_Updated=23/01/2013, Life=V, RoHS=Y, Source=FEC933-0798, Supplier 1=Farnell
R7A R7B: library part FEC933-0496, "Resistor 120R 1% 50V RESC1608X06M", Manufacturer=Multicomp, ManuPartNo="MC 0.063W 0603 1% 120R", Supplier Part Number 1=9330496, Tolerance=1%, Voltage=50V, Class=Resistor, Cost 1+=0.021, Cost 1K+=0.015, Created=23/01/2013, Last_Updated=23/01/2013, Life=V, RoHS=Y, Source=FEC933-0496, Supplier 1=Farnell
R8A R8B R9A R9B: library part FEC933-1247, "Resistor 4K7 1% 50V RESC1608X06M", Manufacturer=Multicomp, ManuPartNo="MC 0.063W 0603 1% 4K7", Supplier Part Number 1=9331247, Tolerance=1%, Voltage=50V, Class=Resistor, Cost 1+=0.021, Cost 1K+=0.015, Created=23/01/2013, Last_Updated=23/01/2013, Life=V, RoHS=Y, Source=FEC933-1247, Supplier 1=Farnell
R13 R14 R16 R17: library part Mouser603-RC0603FR-0762RL, "SMD Chip Resistor, Thick Film, 62 ohm, 75V, 0603 [1608 Metric], 100mW, ± 1%, RC Series", Manufacturer=Yageo, ManuPartNo=RC0603FR-0762RL, Power=100mW, Supplier Part Number 1=603-RC0603FR-0762RL, Tolerance=1%, Voltage=75V, Class=Resistor, ComponentLink1Description=Datasheet, ComponentLink1URL="C:\Altium SANDBOX\Component Database\Datasheet\Yageo RC_L Series.pdf", Cost 1+=0.074, Cost 1K+=0.002, Created=08/06/2018, Last_Updated=08/06/2018, Life=V, RoHS=Y, Source=Mouser603-RC0603FR-0762RL, Supplier 1=Mouser
R22A R22B R22C R22D: library part FEC933-1344, "Resistor 560R 1% 50V RESC1608X06M", Manufacturer=Multicomp, ManuPartNo="MC 0.063W 0603 1% 560R", Supplier Part Number 1=9331344, Tolerance=1%, Voltage=50V, Class=Resistor, Cost 1+=0.021, Cost 1K+=0.015, Created=23/01/2013, Last_Updated=23/01/2013, Life=V, RoHS=Y, Source=FEC933-1344, Supplier 1=Farnell
SB1A SB1B SB2A SB2B SB3A SB3B SB4A SB4B SB5 SB7: "Solder Blob - Closed 0603 SM pads", Created=13/10/2017, Last_Updated=13/10/2017, Life=V, Pin Count=2, RoHS=Y, Source="Solder Blob Closed"
SB6A SB6B: library part "Solder Blob Open", "Solder Blob - Open 0603 SM pads", Created=13/10/2017, Last_Updated=13/10/2017, Life=V, Pin Count=2, RoHS=Y, Source="Solder Blob Open"
SW1A SW1B SW2A SW2B: library part FEC120-1422, "Switch SMD SPST-NO Vertical ITT/Cannon KSR231GLFS", Manufacturer=ITT/Cannon, ManuPartNo=KSR231GLFS, Supplier Part Number 1=1201422, Class="Switch SMD", Cost 1+=0.77, Cost 1K+=0.54, Created=18/09/2013, Last_Updated=18/09/2013, Life=V, Orient=Vertical, RoHS=Y, Source=FEC120-1422, Supplier 1=Farnell, Switch Type=SPST-NO
TP1A TP1B TP2A TP2B TP16A TP16B TP21 TP22: library part FEC2293786, "PCB Test Point S1751 Series, Surface Mount", Manufacturer=Harwin, ManuPartNo=S1751-46R, Supplier Part Number 1=2293786, Class=Connector, ComponentLink1Description=Datasheet, ComponentLink1URL="C:\Altium SANDBOX\Component Database\Datasheet\S1751-46R.pdf", Cost 1+=0.134, Cost 1K+=0.106, Created=16/10/2017, Last_Updated=01/12/2017, Life=V, Orient=Vertical, Pin Count=1, RoHS=Y, Source=FEC2293786, Supplier 1=Farnell
TP3A TP3B TP4A TP4B TP5A TP5B TP6A TP6B TP7A TP7B TP8A TP8B TP9A TP9B TP10A TP10B TP11A TP11B TP13A TP13B TP17 TP18 TP19 TP20: library part "Misc TP1", "Testpoint 1mm dia. Component side, no silk", Supplier Part Number 1=TP1, Class=Testpoint, Created=26/01/2013, Last_Updated=26/01/2013, Source="Misc TP1", Supplier 1=Misc
TP14: library part FEC146-3076, "Connector Test Point Red Keystone 5000", Manufacturer=Keystone, ManuPartNo=5000, Supplier Part Number 1=1463076, Class=Connector, Cost 1+=0.2489, Cost 1K+=0.2489, Created=30/05/2013, Last_Updated=16/12/2015, Life=V, Orient=Vertical, Pin Count=1, RoHS=Y, Source=FEC146-3076, Supplier 1=Farnell
TP15: library part FEC146-3077, "Connector Test Point Black Keystone 5001", Manufacturer=Keystone, ManuPartNo=5001, Supplier Part Number 1=1463077, Class=Connector, Cost 1+=0.2489, Cost 1K+=0.2489, Created=30/05/2013, Last_Updated=16/12/2015, Life=V, Orient=Vertical, Pin Count=1, RoHS=Y, Source=FEC146-3077, Supplier 1=Farnell
U1A U1B: library part FEC845-7255, "IC Supply Voltage Monitor, 2.93V TPS3828-33DBVT SOT23-5", Manufacturer=Texas, ManuPartNo=TPS3828-33DBVT, Supplier Part Number 1=8457255, Class="IC Sensor", ComponentLink1Description=Datasheet, ComponentLink1URL="C:\Altium SANDBOX\Component Database\Datasheet\TPS3828.pdf", Cost 1+=1.08, Cost 1K+=0.73, Created=10/06/2013, Last_Updated=10/06/2013, Life=V, RoHS=Y, Source=FEC845-7255, Supplier 1=Farnell
U2A U2B: library part CMP-06324-000085-1, "IC REG LIN 3.3V 100MA SOT223-3", Case/Package=SOT-223, Dropout Voltage=230mV, Max Input Voltage=26V, Max Operating Temperature=125°C, Min Current Limit=100mA, Min Input Voltage=2.5V, Min Operating Temperature=-40°C, Nominal Output Voltage=3.3V, Lead Free="Lead Free", Mount="Surface Mount", Number of Pins=3, Number of Regulators=1, Output Current=100mA, Output Type=Fixed, Output Voltage=3.3V, Packaging=Rail/Tube, REACH SVHC="No SVHC"
U3A U3B U5: library part CMP-04872-000132-1, "IC TRANSCEIVER FULL 1/1 8SOIC", Manuf Part No=ISO1042DWV, RoHS Compliant=Yes
U4: library part FEC210-0330, "IC Regulator LDO MIC5239-5.0YS SOT-223", Manufacturer=Micrel, ManuPartNo=MIC5239-5.0YS, Supplier Part Number 1=2100330, Class="IC LDO Regulator", ComponentLink1Description=Datasheet, ComponentLink1URL="C:\Altium SANDBOX\Component Database\Datasheet\MIC5239.pdf", Cost 1+=3.22, Cost 1K+=1.3, Created=23/01/2014, Last_Updated=23/01/2014, Life=V, RoHS=Y, Source=FEC210-0330, Supplier 1=Farnell
U6A U6B: library part CMP-12105-000012-1, "IC MCU 32BIT 16KB FLASH 32LQFP", Ambient Temperature Range High=+85°C, Ambient Temperature Range Low=-40°C, Frequency=32MHz, Manufacturer=STMicroelectronics, Manufacturer Part Number=STM32L011K4T6, Max Junction Temp=+105°C, Max Supply Voltage=3.6V, Min Supply Voltage=1.65V, Nominal Supply Current=500-1500uA, Package=LQFP32-5V, Temperature="-40°C to +85°C", Automotive=No, Category=IC, ComponentLink2Description=Datasheet, ComponentLink2URL=https://www.st.com/content/ccc/resource/technical/document/datasheet/42/c0/ab/e5/71/7a/47/0b/DM00206508.pdf/files/DM00206508.pdf/jcr:content/translations/en.DM00206508.pdf, Core Architecture="Arm Cortex-M0+", Data Bus Width=32bits, Device Class L1="Integrated Circuits (ICs)", Device Class L2="Embedded Processors and Controllers", Device Class L3=Microcontrollers, Digikey Description="IC MCU 32BIT 16KB FLASH 32LQFP", Height=1.6mm, Interface=I2C,SPI,UART,USART,IrDA, Ipc Land Pattern Name=QFP80P900X900X160-32, Lead Free=Yes, Memory Size=16KBytes, Memory Type=FLASH, Mouser Description="ARM Microcontrollers - MCU Ultra-low-power ARM Cortex-M0+ MCU with 16-Kbytes Flash, 32 MHz CPU", Number Of A/D Converters=1, Number Of Adc Channels=10, Number Of Cores=1, Number Of I2C Channels=1, Number of I/Os=26, Number Of Spi Channels=1, Number Of Timers/Counters=8, Number Of Uart Channels=2, Octopart=https://octopart.com/stm32l011k4t6-stmicroelectronics-71108062, Ram Size=2KBytes, RoHS=TRUE, Standoff Height=0.05mm, Temperature Range High=+85°C, Temperature Range Low=-40°C
Z1 Z2 Z4 Z5 Z6: library part "Misc_Breakout - 3 hole - short route", "Breakout - 3 hole - short route", Class="Free pads", Created=14/12/2020, Last_Updated=14/12/2020, Source="Misc_Breakout - 3 hole - short route", Supplier 1=Misc

## Free pads (board coordinates)
  round 0 hole 0.8: 0(-21.4,-17.3) 0(-21.4,17.3) 0(-20.475,-18.2) 0(-20.475,18.2) 0(-19.684,-19.273) 0(-19.684,19.273) 0(19.684,-19.273) 0(19.684,19.273) 0(20.475,-18.2) 0(20.475,18.2) 0(21.4,-17.3) 0(21.4,17.3)
  round 1.5 hole 0.8: 1(5.8,-6.7) 1(7,-5.3)
  round 0 hole 4: 1(17.7,49.6) 1(17.7,49.6)